# Altium PCB ALTAIR_PD_Sergeant_V26.4c.PcbDoc (part 1 of 4)
Units mm, origin at the board's own origin, x right, y up, seen from the top; angles counter-clockwise.
Board outline 74 x 56 mm, 4 copper layers (Top Layer, Layer 1, Layer 2, Bottom Layer), stack 1.675 mm thick; 239 components, 159 nets, 760 pads, 127 vias.
Unrouted connection lines stored in the file: 489.
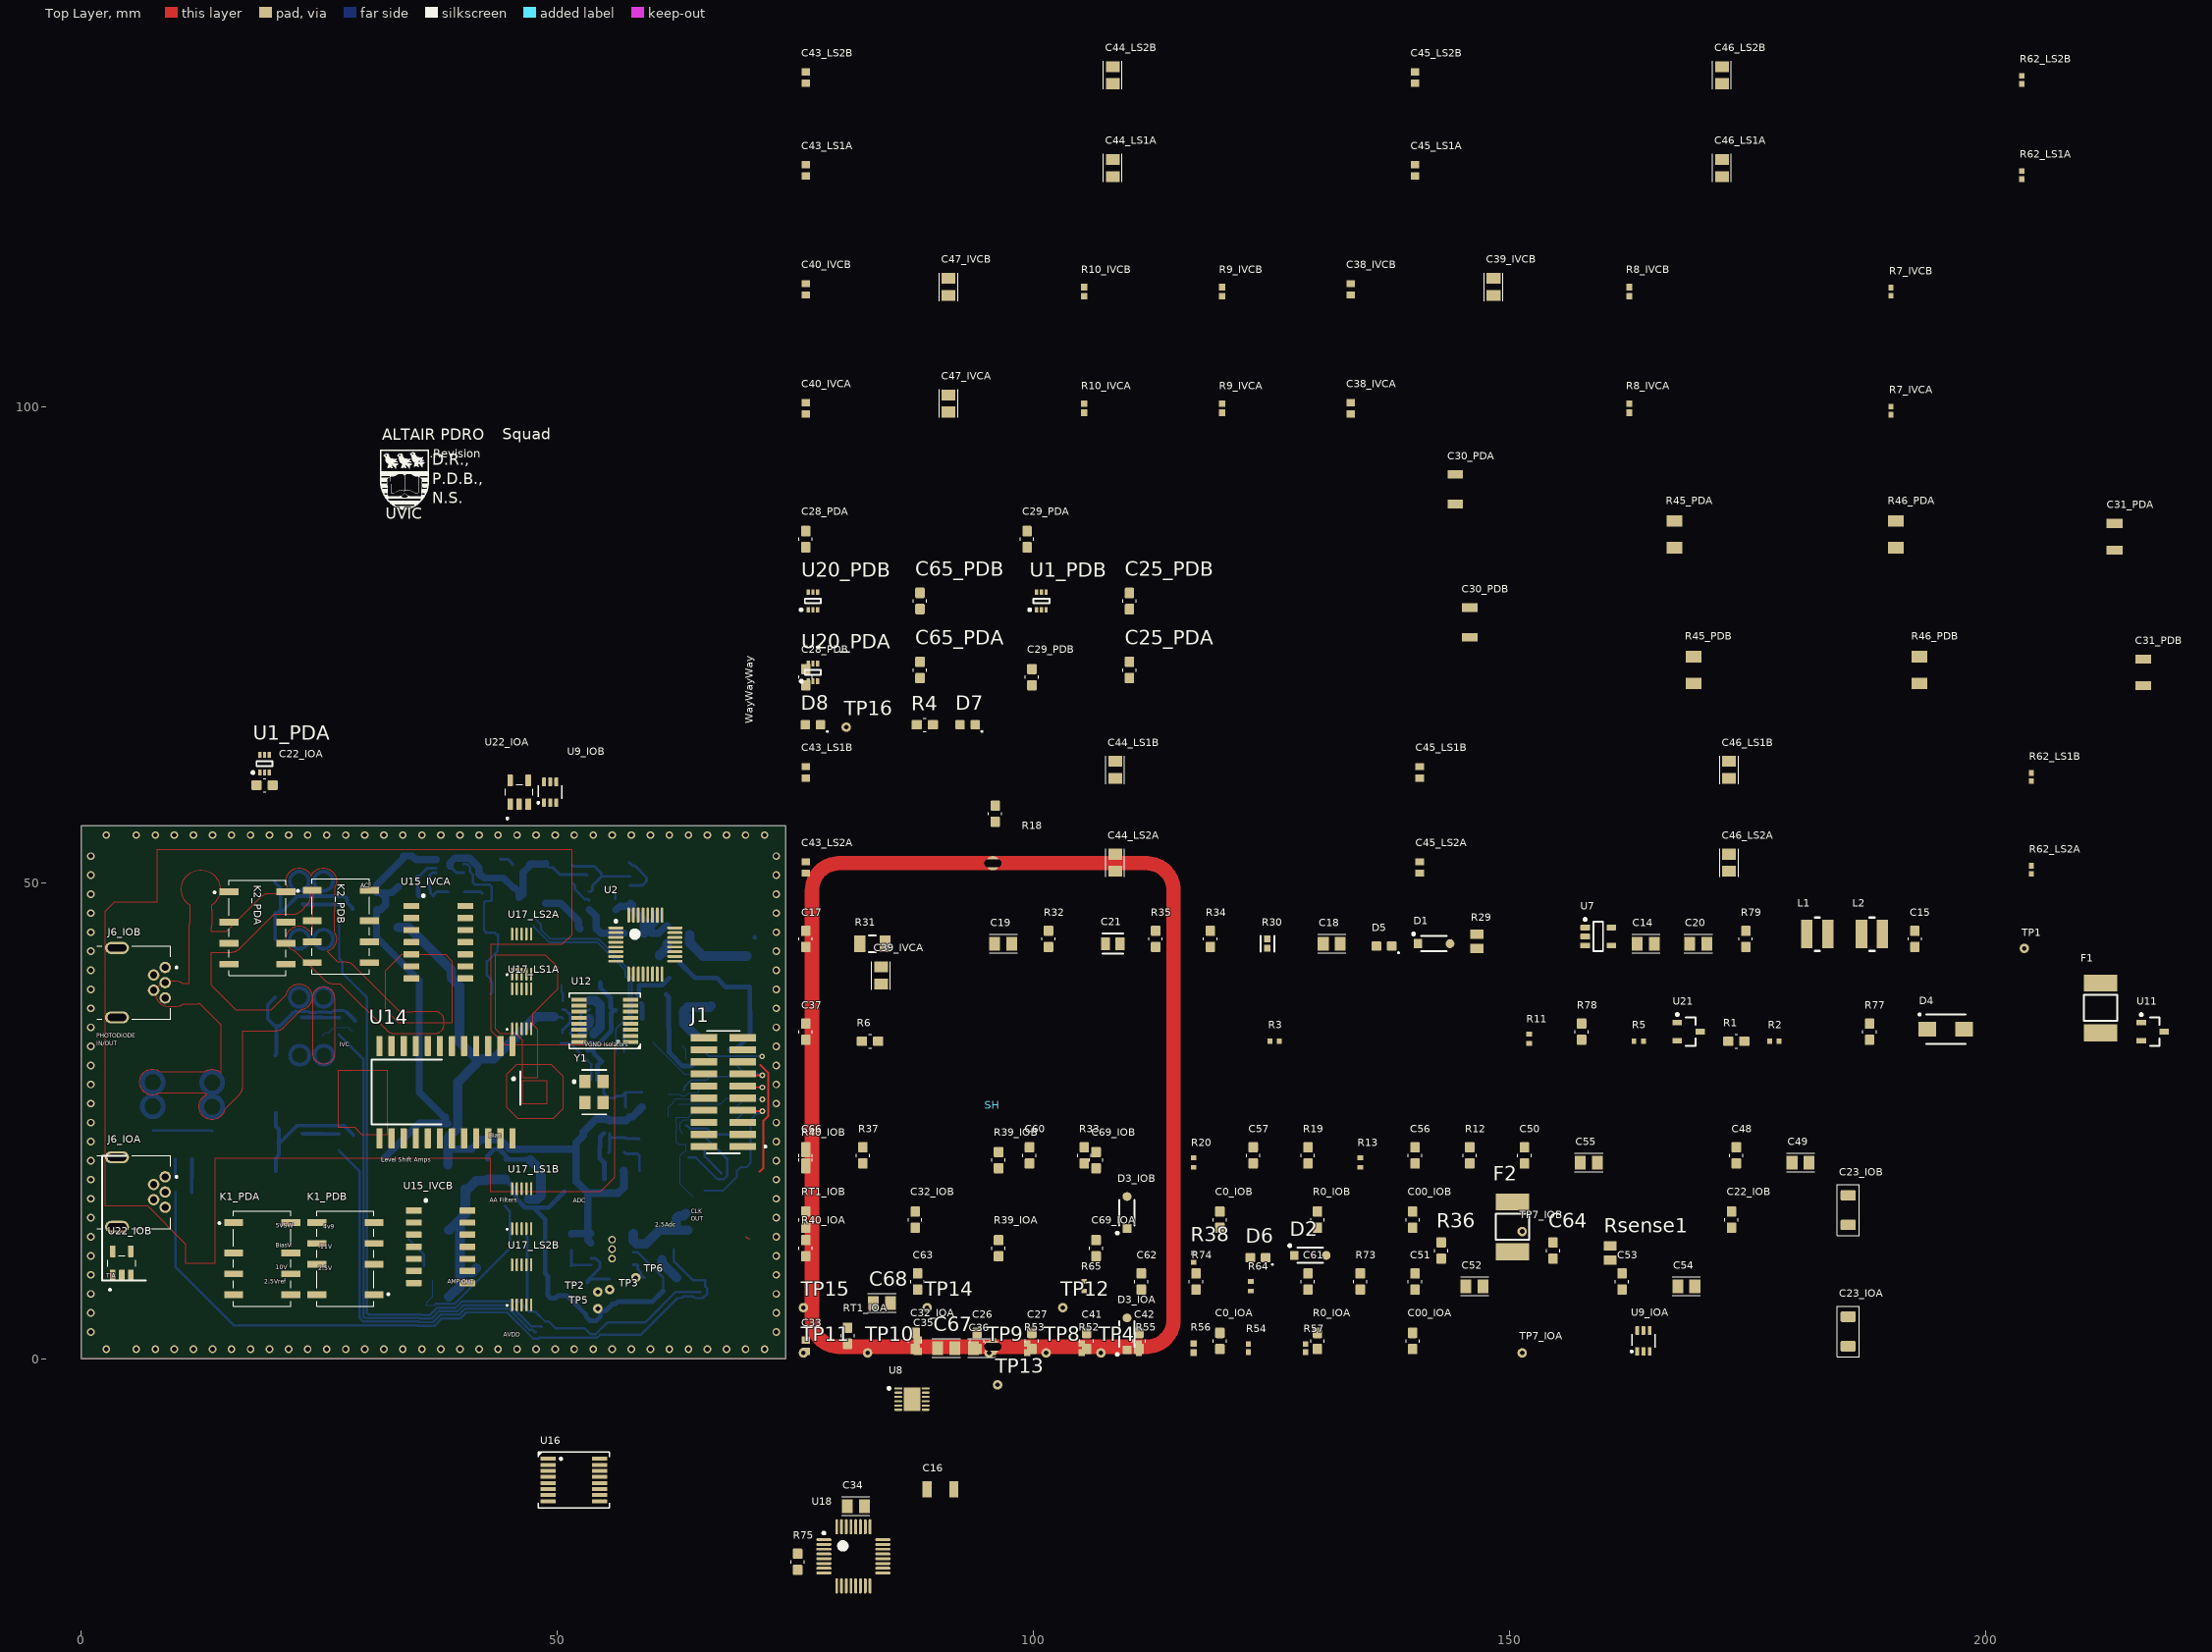
[diagram p0: Top Layer view]
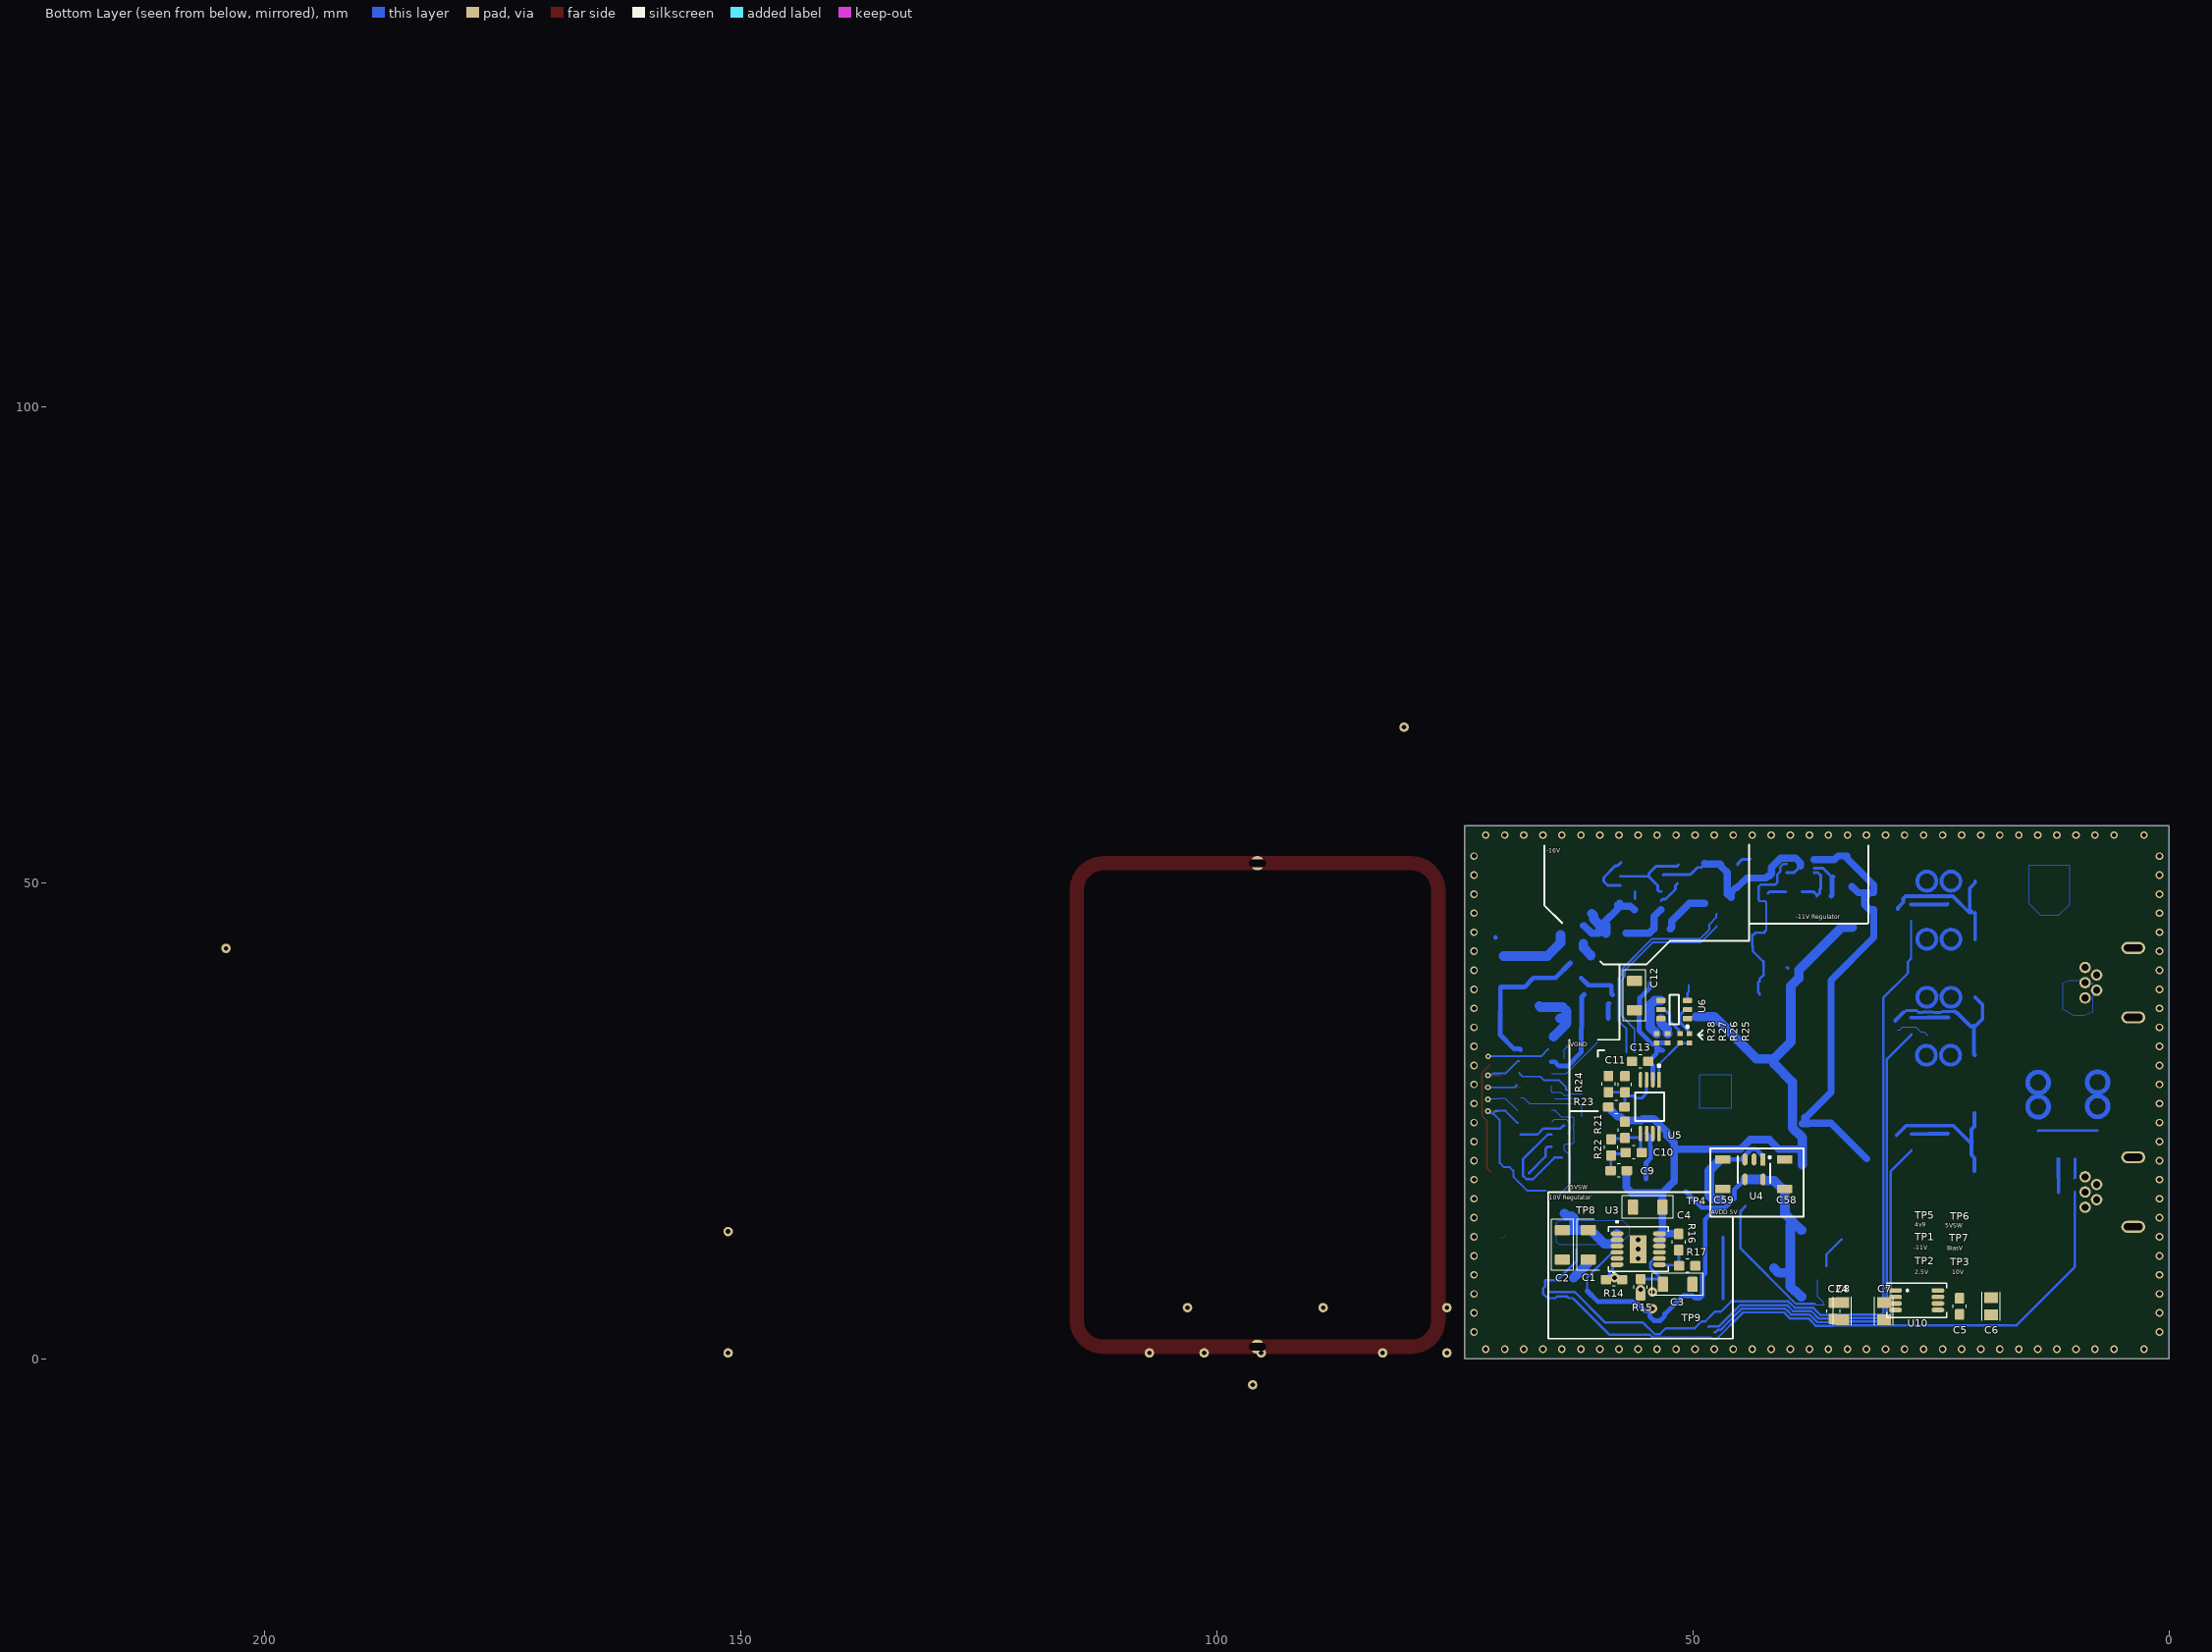
[diagram p1: Bottom Layer view, seen from below]
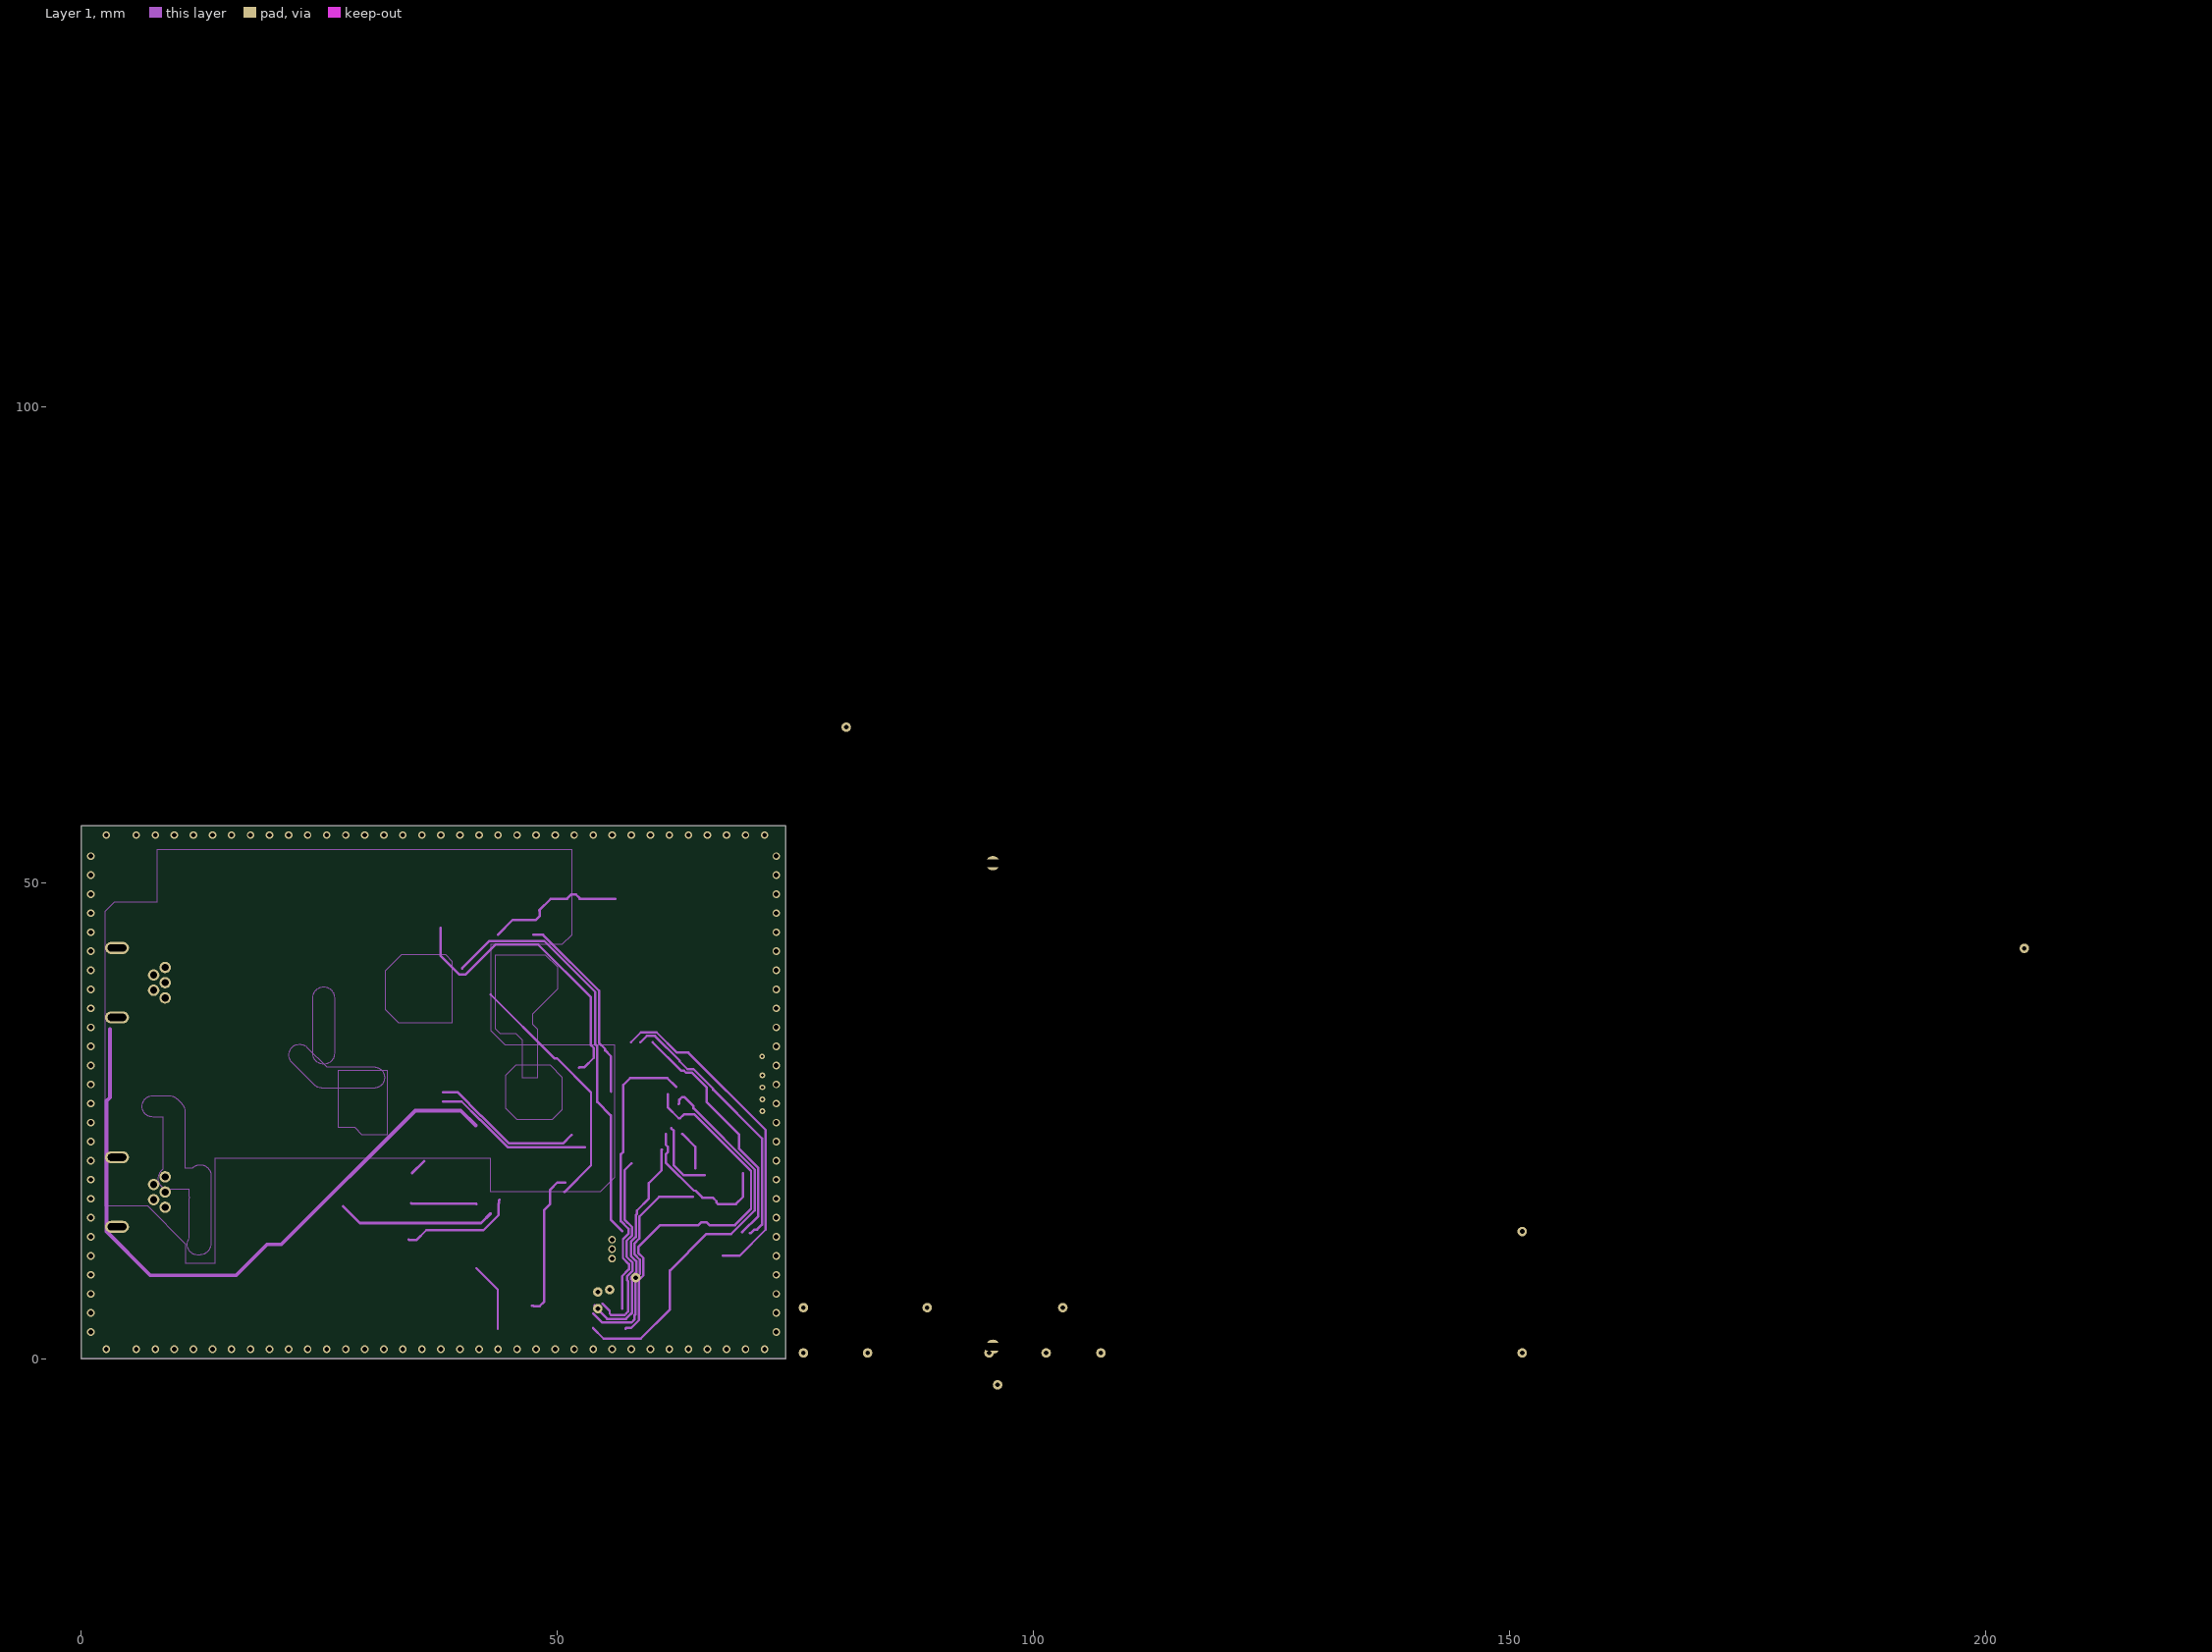
[diagram p2: Layer 1]
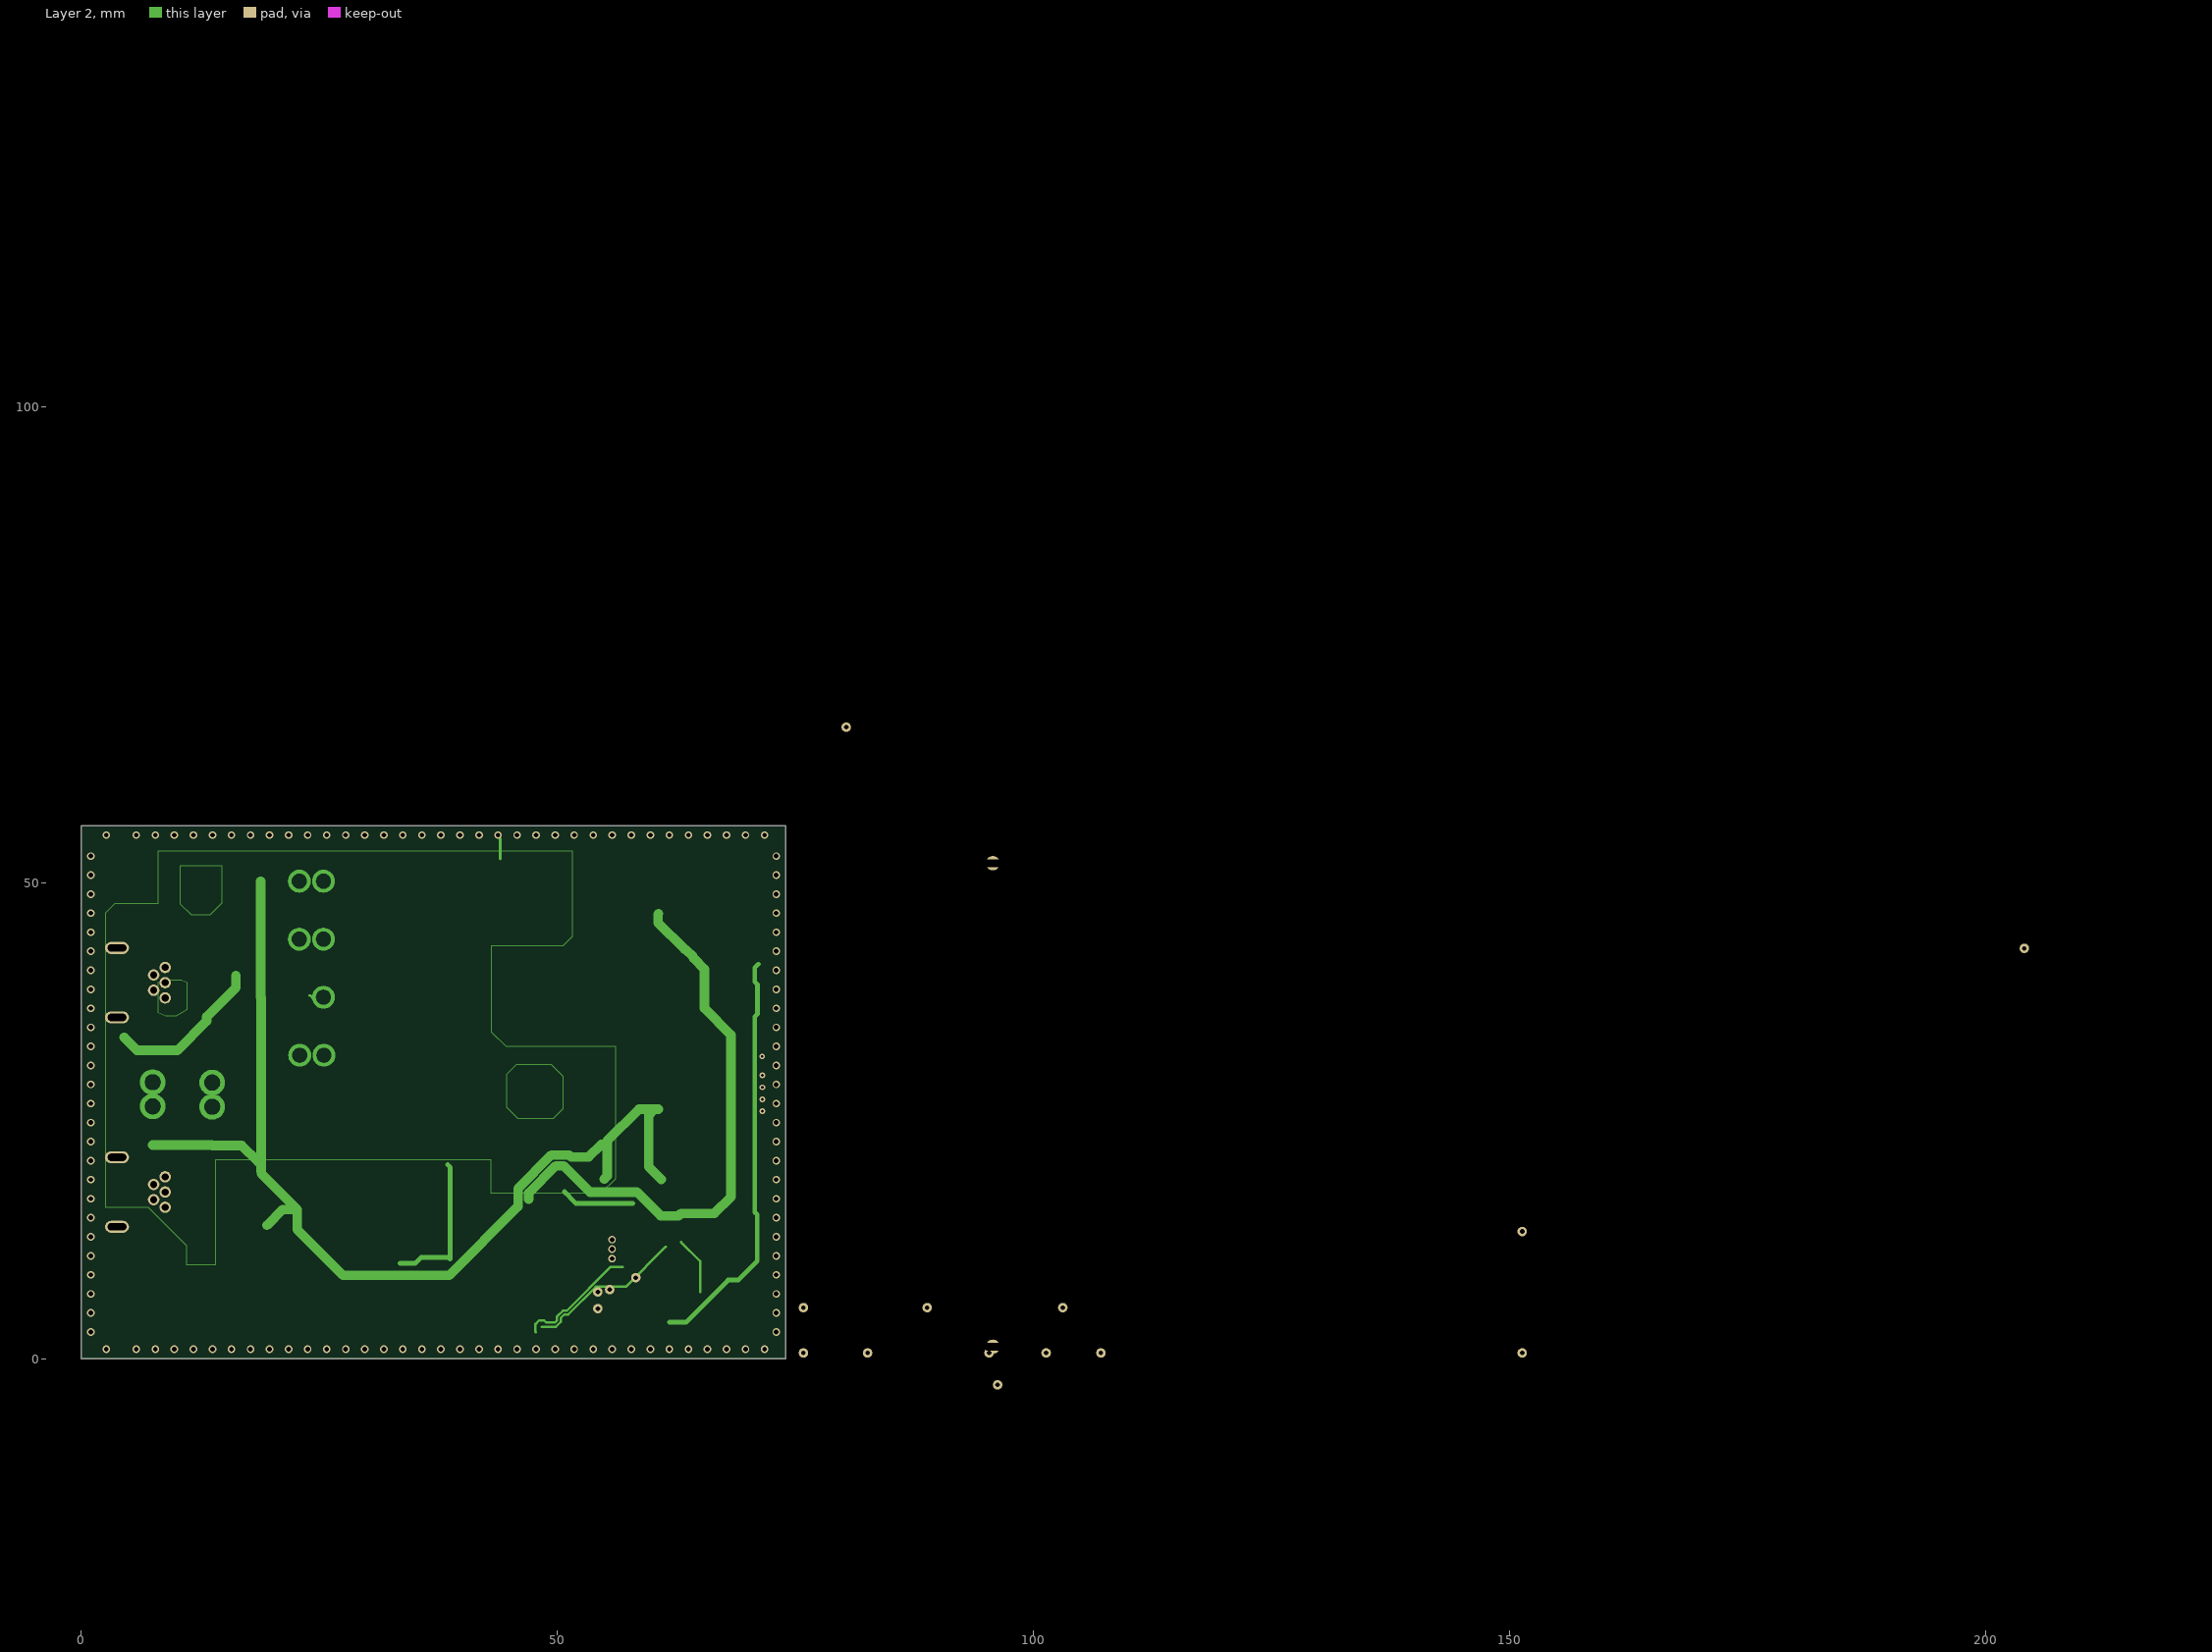
[diagram p3: Layer 2]

## Layer stack, top to bottom
Top Solder: solder mask 0.0254, Solder Resist, Dk 3.5
Top Layer: signal copper 0.0356
Dielectric 2: prepreg 0.1702, FR-408, Dk 4.1
Layer 1: signal copper 0.035
Dielectric 1: core 1.1938, FR-408, Dk 4.8
Layer 2: signal copper 0.035
Dielectric 3: prepreg 0.1702, FR-408, Dk 4.1
Bottom Layer: signal copper 0.0356
Bottom Solder: solder mask 0.0254, Solder Resist, Dk 3.5

## Board outline
0,0 74,0 74,56 0,56

## Design rules (kind name [scope] priority, off if disabled: settings)
AssemblyTestPointUsage [All] p1: isadvanced=TRUE
AssemblyTestpoint [All] p1: isadvanced=TRUE testpointundercomponent=TRUE minsize=1.016 maxsize=2.54 preferedsize=1.524 minholesize=0 maxholesize=1.016 preferedholesize=0.813 testpointgrid=0.025 usegrid=TRUE gridtolerance=0 allowsidetop=TRUE allowsidebottom=TRUE
Clearance ViaNotInPad [IsVia vs IsPad and not InPadClass('AllowVia')] p1: isadvanced=TRUE gap=0.152 ignorepadtopadclearanceinfootprint=FALSE
Clearance SoldierGuard [InNamedPolygon('SOLDIER_GUARD_L01_P001')] p2 off: isadvanced=TRUE gap=0.19 ignorepadtopadclearanceinfootprint=FALSE
Clearance UsbGuard [InNamedPolygon('GUARD_L02_P002') or InNamedPolygon('GUARD_L03_P002') or InNamedPolygon('GUARD_LBS_P001')] p3: isadvanced=TRUE gap=0.2 ignorepadtopadclearanceinfootprint=FALSE
Clearance Clearance_3 [InNamedPolygon('SYS_DVDD_L01_P001') or InNamedPolygon('SYS_DVDD_L03_P001')] p4 off: isadvanced=TRUE gap=0.25 ignorepadtopadclearanceinfootprint=FALSE
Clearance Clearance_1 [(ExistsOnLayer('Layer 1') Or ExistsOnLayer('Layer 2')) vs (ExistsOnLayer('Layer 1') Or ExistsOnLayer('Layer 2'))] p5: gap=0.2 ignorepadtopadclearanceinfootprint=TRUE except(0: Arc-Hole Track-Hole SMDPad-Hole THPad-Hole Via-Hole Fill-Hole Poly-Hole Region-Hole Text-Hole; 0.127: Arc-Arc Arc-Track Arc-SMDPad Arc-Text Track-Track Track-SMDPad Track-Text SMDPad-SMDPad SMDPad-Text Text-Text; 0.22: Arc-Via Track-Via Via-Text; 0.254: Arc-THPad Track-THPad SMDPad-THPad SMDPad-Via THPad-THPad THPad-Via THPad-Fill THPad-Poly THPad-Region THPad-Text Via-Via Fill-Fill Fill-Poly Fill-Region Poly-Poly Poly-Region Region-Region Hole-Hole) sourcerule=54 cellrowname=All cellrowtype=0 cellcolname=All cellcoltype=0 innerlayers=TRUE
Clearance Clearance_2 [(ExistsOnLayer('Top Layer') Or ExistsOnLayer('Bottom Layer')) vs (ExistsOnLayer('Top Layer') Or ExistsOnLayer('Bottom Layer'))] p6: gap=0.2 ignorepadtopadclearanceinfootprint=TRUE except(0: Arc-Hole Track-Hole SMDPad-Hole THPad-Hole Via-Hole Fill-Hole Poly-Hole Region-Hole Text-Hole; 0.127: Arc-Arc Arc-Track Arc-SMDPad Arc-Text Track-Track Track-SMDPad Track-Text SMDPad-SMDPad SMDPad-Text Text-Text; 0.22: Arc-Via Track-Via Via-Text; 0.254: Arc-THPad Track-THPad SMDPad-THPad SMDPad-Via THPad-THPad THPad-Via THPad-Fill THPad-Poly THPad-Region THPad-Text Via-Via Fill-Fill Fill-Poly Fill-Region Poly-Poly Poly-Region Region-Region Hole-Hole) sourcerule=54 cellrowname=All cellrowtype=0 cellcolname=All cellcoltype=0 outerlayers=TRUE
Clearance [All] p7: gap=0.254 ignorepadtopadclearanceinfootprint=TRUE ismatrix=TRUE
ComponentClearance [All] p1: isadvanced=TRUE gap=0.254 collisioncheckmode=3 verticalgap=0.254 showdistances=FALSE
FabricationTestPointUsage [All] p1: isadvanced=TRUE valid=0 allowmultiple=FALSE
FabricationTestpoint [All] p1: isadvanced=TRUE side=3 testpointundercomponent=TRUE minsize=1.016 maxsize=2.54 preferedsize=1.524 minholesize=0 maxholesize=1.016 preferedholesize=0.813 testpointgrid=0.025 allowsidetop=TRUE allowsidebottom=TRUE usegrid=TRUE gridtolerance=0
FanoutControl Fanout_BGA [IsBGA] p1: isadvanced=TRUE bgadir=Out bgaviamode=Centered fanoutstyle=Auto fanoutdirection=Alternating viagrid=0.025 // Fanout_BGA (Default Rule)
FanoutControl Fanout_LCC [IsLCC] p2: isadvanced=TRUE bgadir=Out bgaviamode=Centered fanoutstyle=Auto fanoutdirection=Alternating viagrid=0.025 // Fanout_LCC (Default Rule)
FanoutControl Fanout_SOIC [IsSOIC] p3: isadvanced=TRUE bgadir=Out bgaviamode=Centered fanoutstyle=Auto fanoutdirection=Alternating viagrid=0.025 // Fanout_SOIC (Default Rule)
FanoutControl Fanout_Small [(CompPinCount < 5)] p4: isadvanced=TRUE bgadir=Out bgaviamode=Centered fanoutstyle=Auto fanoutdirection=OutThenIn viagrid=0.025 // Fanout_Small (Default Rule)
FanoutControl Fanout_Default [All] p5: isadvanced=TRUE bgadir=Out bgaviamode=Centered fanoutstyle=Auto fanoutdirection=Alternating viagrid=0.025 // Fanout_Default (Default Rule)
Height [All] p1: isadvanced=TRUE minheight=0 maxheight=25.4 prefheight=12.7
HoleSize [All] p1: isadvanced=TRUE absolutevalues=TRUE maxlimit=4 minlimit=0.2 maxpercent=80.000 minpercent=20.000
HoleToHoleClearance [All] p1: isadvanced=TRUE gap=0.407 allowstackedmicrovias=TRUE // From PCBWay Advanced Capabilities
LayerPairs [All] p1: isadvanced=TRUE enforce=TRUE
MinimumSolderMaskSliver [All] p1: isadvanced=TRUE minsoldermaskwidth=0.076 // From PCBWay Advanced Capabilities
NetAntennae [All] p1 off: isadvanced=TRUE netantennaetolerance=0
PasteMaskExpansion [All] p1: isadvanced=TRUE expansion=0
PlaneClearance [All] p1: isadvanced=TRUE clearance=0.508
PlaneConnect [All] p1: isadvanced=TRUE planeconnectstyle=Relief reliefexpansion=0.508 reliefentries=4 reliefconductorwidth=0.254 reliefairgap=0.254
PolygonConnect PolygonConnectStyle_DCV [InPolygonClass('DirectConnectVias')] p1: isadvanced=TRUE thpad.connectstyle=Relief thpad.reliefconductorwidth=0.254 thpad.reliefentries=4 thpad.polygonreliefangle="90 Angle" thpad.airgapwidth=0.254 smdpad.connectstyle=Relief smdpad.reliefconductorwidth=0.254 smdpad.reliefentries=4 smdpad.polygonreliefangle="90 Angle" smdpad.airgapwidth=0.254 via.connectstyle=Direct via.reliefconductorwidth=0.254 via.reliefentries=2 via.polygonreliefangle="0 Angle" via.airgapwidth=0.254
PolygonConnect PolygonConnectStyle_DCE [InPolygonClass('DirectConnectEverything')] p2: isadvanced=TRUE connectstyle=Direct reliefconductorwidth=0.254 reliefentries=2 polygonreliefangle="0 Angle" airgapwidth=0.254
PolygonConnect [All] p3: connectstyle=Relief reliefconductorwidth=0.254 reliefentries=4 polygonreliefangle="90 Angle" airgapwidth=0.254
RoutingCorners [All] p1: isadvanced=TRUE cornerstyle=45-Degree minsetback=2.54 maxsetback=2.54
RoutingPriority [All] p1: isadvanced=TRUE routingpriority=0
RoutingVias RoutingViaStyle_3 [All] p1: isadvanced=TRUE holewidth=0.3 width=0.6 viastyle="Through Hole" minholewidth=0.3 minwidth=0.6 maxholewidth=0.711 maxwidth=1.27
RoutingVias [All] p2: holewidth=0.711 width=1.27 viastyle="Through Hole" minholewidth=0.711 minwidth=1.27 maxholewidth=0.711 maxwidth=1.27
ShortCircuit [All] p1: isadvanced=TRUE allowed=FALSE
SilkToSilkClearance [All] p1 off: isadvanced=TRUE silktosilkclearance=0.254
SilkToSolderMaskClearance [IsPad or IsPoly] p1: isadvanced=TRUE minsilkscreentomaskgap=0.15 clearancetoexposedcopper=TRUE
SolderMaskExpansion ExposeGuard [InNet('PD_A')] p1: isadvanced=TRUE expansion=1 istentingtop=FALSE
SolderMaskExpansion [All] p2: isadvanced=TRUE expansion=0 istentingtop=FALSE
SupplyNets "Schematic Supply Nets_4" [InNet('LEDNG')] p1: voltage=0.000
SupplyNets "Schematic Supply Nets" [InNet('LEDPG')] p2: voltage=0.000
SupplyNets "Schematic Supply Nets_3" [InNet('-11V_EN')] p3: voltage=0.000
SupplyNets "Schematic Supply Nets_5" [InNet('3V3')] p4: isadvanced=TRUE voltage=0.000
SupplyNets "Schematic Supply Nets_9" [InNet('A2V5')] p5: isadvanced=TRUE voltage=0.000
SupplyNets "Schematic Supply Nets_8" [InNet('-11V')] p6: isadvanced=TRUE voltage=0.000
SupplyNets "Schematic Supply Nets_7" [InNet('4V9')] p7: isadvanced=TRUE voltage=0.000
SupplyNets "Schematic Supply Nets_6" [InNet('10V')] p8: isadvanced=TRUE voltage=0.000
SupplyNets "Schematic Supply Nets_2" [InNet('SYS_GND')] p9: isadvanced=TRUE voltage=0.000
SupplyNets "Schematic Supply Nets_1" [InNet('A5VSW')] p10: isadvanced=TRUE voltage=0.000
UnRoutedNet [All] p1: isadvanced=TRUE
UnpouredPolygon [All] p1: isadvanced=TRUE
Width [All] p1: maxlimit=5 minlimit=0.127 preferedwidth=0.254 midlayer1_minwidth=0.254 midlayer2_minwidth=0.254 minimp=50.000000 maximp=50.000000 favimp=50.000000
4 further rules are at their usual default settings.

## Classes and differential pairs
channel class BIAS_IO: IOA IOB
component class IOB: C0_IOB C00_IOB C22_IOB C23_IOB C32_IOB C69_IOB D3_IOB J4_IOB J6_IOB R0_IOB R39_IOB R40_IOB RT1_IOB TP7_IOB U9_IOB U22_IOB
component class IOA: C0_IOA C00_IOA C22_IOA C23_IOA C32_IOA C69_IOA D3_IOA J4_IOA J6_IOA R0_IOA R39_IOA RT1_IOA TP7_IOA U9_IOA U22_IOA
component class ADCA: C51 C52 C53 C54 C61 C62 C63 C67 R64 R65 R73 R74 R75 TP10 TP11 U2
channel class TIA_SWITCHES: PDA PDB
channel class Level_Shifter: LS1A LS1B LS2A LS2B
channel class IVC_INTEGRATOR: IVCA IVCB
component class PWR-: C14 C15 C16 C17 C18 C19 C20 C21 D1 D5 L1 L2 R29 R30 R31 R32 R34 R35 R79 TP1 U7 U8
component class LS2B: C43_LS2B C44_LS2B C45_LS2B C46_LS2B R62_LS2B U17_LS2B
component class LS1A: C43_LS1A C44_LS1A C45_LS1A C46_LS1A R62_LS1A U17_LS1A
component class IVCB: C38_IVCB C39_IVCB C40_IVCB C47_IVCB R7_IVCB R8_IVCB R9_IVCB R10_IVCB U15_IVCB
component class IVCA: C38_IVCA C39_IVCA C40_IVCA C47_IVCA R7_IVCA R8_IVCA R9_IVCA R10_IVCA U15_IVCA
component class PDB: C25_PDB C28_PDB C29_PDB C30_PDB C31_PDB C65_PDB K1_PDB K2_PDB R45_PDB R46_PDB U1_PDB U13_Designator2 U20_PDB
component class PDA: C25_PDA C28_PDA C29_PDA C30_PDA C31_PDA C65_PDA K1_PDA K2_PDA R45_PDA R46_PDA U1_PDA U13_Designator1 U20_PDA
component class LS1B: C43_LS1B C44_LS1B C45_LS1B C46_LS1B R62_LS1B U17_LS1B
component class LS2A: C43_LS2A C44_LS2A C45_LS2A C46_LS2A R62_LS2A U17_LS2A
polygon class DirectConnectVias: NONET_L01_P265 SYS_GND_L02_P001 SYS_GND_L03_P001 SYS_GND_L04_P001
polygon class DirectConnectEverything: GUARD_L01_P231 GUARD_L01_P238 GUARD_L02_P187 GUARD_L02_P219 GUARD_L04_P001 GUARD_L04_P002 GUARD_L04_P003 Intercon_guard Intercon_guard_Sub IVC_GUARD_SUB NETJ9_1_L01_P226 NONET_L01_P264 NONET_L01_P265 NONET_L02_P241 NONET_L03_P191 SOLDIER_GUARD_L01_P001 SOLDIER_GUARD_L02_P001 SOLDIER_GUARD_L03_P001 SOLDIER_GUARD_L04_P001 SYS_GND_L02_P001 SYS_GND_L03_P001 SYS_GND_L04_P001 TIA_GUARD_SUB TraceGuard VBAT_L04_P002
component class ADCB: C48 C49 C50 C55 C56 C57 C60 C66 C68 R12 R13 R19 R20 R33 R37 TP12 TP13 TP14 TP15 U18
component class PWR+: C1 C2 C3 C4 C5 C6 C7 C8 C9 C10 C11 C12 C13 C24 C58 C59 D7 D8 R14 R15 R16 R17 R18 R21 R22 R23 R24 R25 R26 R27 R28 TP2 TP3 TP5 TP6 TP16 U3 U4 U5 U6 U10
component class ACF: C33 C34 C35 C36 R52 R53 R54 R55 R56 R57 U14
component class INT: C26 C27 C37 C41 C42 C64 D4 D6 F1 F2 J1 R1 R2 R3 R5 R6 R11 R36 R38 R77 R78 Rsense1 SH U11 U12 U16 U21 Y1

## Components (designator, comment, footprint, x,y, rotation, side; value= is the part's Value field where it differs from the comment)
C00_IOA "TBD OPT" "CAP 0603 IPC MID DENSITY" 139.85,1.85 r90 top (schematic designator C00)
C0_IOA "TBD OPT" "CAP 0603 IPC MID DENSITY" 119.6,1.85 r90 top (schematic designator C0)
C00_IOB "TBD OPT" "CAP 0603 IPC MID DENSITY" 139.85,14.6 r90 top (schematic designator C00)
C0_IOB "TBD OPT" "CAP 0603 IPC MID DENSITY" 119.6,14.6 r90 top (schematic designator C0)
C1 "10uF" "CAP 1206 IPC LOW DENSITY" 61,11.947 r90 bottom
C2 "10uF" "CAP 1206 IPC LOW DENSITY" 63.718,11.947 r90 bottom
C3 "10uF" "CAP 1206 IPC LOW DENSITY" 51.6,7.8 r0 bottom
C4 "10uF" "CAP 1206 IPC LOW DENSITY" 54.75,15.925 r180 bottom
C5 "0.1uF" "CAP 0603 IPC MID DENSITY" 22,5.5 r90 bottom
C6 "10uF" "CAP 0805 IPC MID DENSITY" 18.688,5.5 r270 bottom
C7 "10uF" "CAP 0805 IPC MID DENSITY" 29.938,5 r270 bottom
C8 "10uF" "CAP 0805 IPC MID DENSITY" 34.311,5 r90 bottom
C9 "1uF" "CAP 0603 IPC MID DENSITY" 57.8,19.75 r180 bottom
C10 "0.1uF" "CAP 0603 IPC MID DENSITY" 56.225,21.65 r180 bottom
C11 "0.1uF" "CAP 0603 IPC MID DENSITY" 57.15,28.825 r270 bottom
C12 "10uF" "CAP 1206 IPC LOW DENSITY" 56.15,38.15 r270 bottom
C13 "0.1uF" "CAP 0603 IPC MID DENSITY" 55.55,31.225 r180 bottom
C14 "10uF" "CAP 0805 IPC MID DENSITY" 164.35,43.6 r0 top
C15 "1uF" "CAP 0603 IPC MID DENSITY" 192.6,44.1 r90 top
C16 "330pF" "CAP 1206 NON-IPC KEMET NP0" 90.25,-13.75 r0 top
C17 "1uF DNP" "CAP 0603 IPC MID DENSITY" 76.1,44.1 r90 top
C18 "10uF" "CAP 0805 IPC MID DENSITY" 131.35,43.6 r0 top
C19 "10uF" "CAP 0805 IPC MID DENSITY" 96.85,43.6 r0 top
C20 "10uF" "CAP 0805 IPC MID DENSITY" 169.85,43.6 r0 top
C21 "4.7uF" "CAP 0805 NON-IPC KEMET X5R" 108.35,43.6 r0 top
C22_IOA "0.1uF" "CAP 0603 IPC MID DENSITY" 19.25,60.25 r0 top (schematic designator C22)
C22_IOB "0.1uF" "CAP 0603 IPC MID DENSITY" 173.35,14.6 r90 top (schematic designator C22)
C23_IOA "10uF" "CAP 1206 IPC LOW DENSITY" 185.6,2.85 r90 top (schematic designator C23)
C23_IOB "10uF" "CAP 1206 IPC LOW DENSITY" 185.6,15.6 r90 top (schematic designator C23)
C24 "0.1uF" "CAP 0603 IPC MID DENSITY" 35.25,5 r270 bottom
C25_PDA "0.1uF" "CAP 0603 IPC MID DENSITY" 110.1,72.35 r90 top (schematic designator C25)
C25_PDB "0.1uF" "CAP 0603 IPC MID DENSITY" 110.1,79.6 r90 top (schematic designator C25)
C26 "0.1uF" "CAP 0603 IPC MID DENSITY" 94.1,1.85 r90 top
C27 "0.1uF" "CAP 0603 IPC MID DENSITY" 99.85,1.85 r90 top
C28_PDA "1uF" "CAP 0603 IPC MID DENSITY" 76.1,86.1 r90 top (schematic designator C28)
C28_PDB "1uF" "CAP 0603 IPC MID DENSITY" 76.1,71.6 r90 top (schematic designator C28)
C29_PDA "0.1uF" "CAP 0603 IPC MID DENSITY" 99.35,86.1 r90 top (schematic designator C29)
C29_PDB "0.1uF" "CAP 0603 IPC MID DENSITY" 99.85,71.6 r90 top (schematic designator C29)
C30_PDA "10pF" "CAP 1206 UNKNOWN" 144.35,91.35 r90 top (schematic designator C30)
C30_PDB "10pF" "CAP 1206 UNKNOWN" 145.85,77.35 r90 top (schematic designator C30)
C31_PDA "300pF" "CAP 1206 NON-IPC KEMET NP0" 213.6,86.35 r90 top (schematic designator C31)
C31_PDB "300pF" "CAP 1206 NON-IPC KEMET NP0" 216.6,72.1 r90 top (schematic designator C31)
C32_IOA "0.1uF" "CAP 0603 IPC MID DENSITY" 87.6,1.85 r90 top (schematic designator C32)
C32_IOB "0.1uF" "CAP 0603 IPC MID DENSITY" 87.6,14.6 r90 top (schematic designator C32)
C33 "0.1uF" "CAP 0603 NON-IPC KEMET X7R" 76.1,1.35 r90 top
C34 "10uF" "CAP 0805 IPC MID DENSITY" 81.35,-15.5 r0 top
C35 "0.1uF" "CAP 0603 NON-IPC KEMET X7R" 87.85,1.35 r90 top
C36 "10uF" "CAP 0805 IPC MID DENSITY" 94.6,1.1 r0 top
C37 "0.1uF" "CAP 0603 IPC MID DENSITY" 76.1,34.35 r90 top
C38_IVCA "0.1uF" "CAP 0603 NON-IPC KEMET X7R" 133.35,99.85 r90 top (schematic designator C38)
C38_IVCB "0.1uF" "CAP 0603 NON-IPC KEMET X7R" 133.35,112.35 r90 top (schematic designator C38)
C39_IVCA "10uF" "CAP 0805 IPC MID DENSITY" 84,40.25 r90 top (schematic designator C39)
C39_IVCB "10uF" "CAP 0805 IPC MID DENSITY" 148.35,112.6 r90 top (schematic designator C39)
C40_IVCA "0.1uF" "CAP 0603 NON-IPC KEMET X7R" 76.1,99.85 r90 top (schematic designator C40)
C40_IVCB "0.1uF" "CAP 0603 NON-IPC KEMET X7R" 76.1,112.35 r90 top (schematic designator C40)
C41 "0.1uF" "CAP 0603 IPC MID DENSITY" 105.6,1.85 r90 top
C42 "0.1uF" "CAP 0603 IPC MID DENSITY" 111.1,1.85 r90 top
C43_LS1A "0.1uF" "CAP 0603 NON-IPC KEMET X7R" 76.1,124.85 r90 top (schematic designator C43)
C43_LS1B "0.1uF" "CAP 0603 NON-IPC KEMET X7R" 76.1,61.6 r90 top (schematic designator C43)
C43_LS2A "0.1uF" "CAP 0603 NON-IPC KEMET X7R" 76.1,51.6 r90 top (schematic designator C43)
C43_LS2B "0.1uF" "CAP 0603 NON-IPC KEMET X7R" 76.1,134.6 r90 top (schematic designator C43)
C44_LS1A "10uF" "CAP 0805 IPC MID DENSITY" 108.35,125.1 r90 top (schematic designator C44)
C44_LS1B "10uF" "CAP 0805 IPC MID DENSITY" 108.6,61.85 r90 top (schematic designator C44)
C44_LS2A "10uF" "CAP 0805 IPC MID DENSITY" 108.6,52.1 r90 top (schematic designator C44)
C44_LS2B "10uF" "CAP 0805 IPC MID DENSITY" 108.35,134.85 r90 top (schematic designator C44)
C45_LS1A "0.1uF" "CAP 0603 NON-IPC KEMET X7R" 140.1,124.85 r90 top (schematic designator C45)
C45_LS1B "0.1uF" "CAP 0603 NON-IPC KEMET X7R" 140.6,61.6 r90 top (schematic designator C45)
C45_LS2A "0.1uF" "CAP 0603 NON-IPC KEMET X7R" 140.6,51.6 r90 top (schematic designator C45)
C45_LS2B "0.1uF" "CAP 0603 NON-IPC KEMET X7R" 140.1,134.6 r90 top (schematic designator C45)
C46_LS1A "10uF" "CAP 0805 IPC MID DENSITY" 172.35,125.1 r90 top (schematic designator C46)
C46_LS1B "10uF" "CAP 0805 IPC MID DENSITY" 173.1,61.85 r90 top (schematic designator C46)
C46_LS2A "10uF" "CAP 0805 IPC MID DENSITY" 173.1,52.1 r90 top (schematic designator C46)
C46_LS2B "10uF" "CAP 0805 IPC MID DENSITY" 172.35,134.85 r90 top (schematic designator C46)
C47_IVCA "10uF" "CAP 0805 IPC MID DENSITY" 91.1,100.35 r90 top (schematic designator C47)
C47_IVCB "10uF" "CAP 0805 IPC MID DENSITY" 91.1,112.6 r90 top (schematic designator C47)
C48 "0.1uF" "CAP 0603 IPC MID DENSITY" 173.85,21.35 r90 top
C49 "10uF" "CAP 0805 IPC MID DENSITY" 180.6,20.6 r0 top
C50 "0.1uF" "CAP 0603 IPC MID DENSITY" 151.6,21.35 r90 top
C51 "0.1uF" "CAP 0603 IPC MID DENSITY" 140.1,8.1 r90 top
C52 "10uF" "CAP 0805 IPC MID DENSITY" 146.35,7.6 r0 top
C53 "0.1uF" "CAP 0603 IPC MID DENSITY" 161.85,8.1 r90 top
C54 "10uF" "CAP 0805 IPC MID DENSITY" 168.6,7.6 r0 top
C55 "10uF" "CAP 0805 IPC MID DENSITY" 158.35,20.6 r0 top
C56 "2nF" "CAP 0603 IPC MID DENSITY" 140.1,21.35 r90 top
C57 "2nF" "CAP 0603 IPC MID DENSITY" 123.1,21.35 r90 top
C58 "2.2uF" "CAP 1206 UNKNOWN" 40.35,19.375 r90 bottom
C59 "2.2uF" "CAP 1206 UNKNOWN" 46.85,19.375 r270 bottom
C60 "2nF" "CAP 0603 IPC MID DENSITY" 99.6,21.35 r90 top
C61 "2nF" "CAP 0603 IPC MID DENSITY" 128.85,8.1 r90 top
C62 "2nF" "CAP 0603 IPC MID DENSITY" 111.35,8.1 r90 top
C63 "2nF" "CAP 0603 IPC MID DENSITY" 87.85,8.1 r90 top
C64 "0.1uF" "CAP 0603 IPC MID DENSITY" 154.6,11.35 r90 top
C65_PDA "0.1uF" "CAP 0603 IPC MID DENSITY" 88.1,72.35 r90 top (schematic designator C65)
C65_PDB "0.1uF" "CAP 0603 IPC MID DENSITY" 88.1,79.6 r90 top (schematic designator C65)
C66 "2nF" "CAP 0603 IPC MID DENSITY" 76.1,21.35 r90 top
C67 "10uF" "CAP 0805 IPC MID DENSITY" 90.85,1.1 r0 top
C68 "10uF" "CAP 0805 IPC MID DENSITY" 84.1,5.85 r0 top
C69_IOA "1uF" "CAP 0603 IPC MID DENSITY" 106.6,11.6 r90 top (schematic designator C69)
C69_IOB "1uF" "CAP 0603 IPC MID DENSITY" 106.6,20.85 r90 top (schematic designator C69)
D1 "MBR0520" "SOD-123 ONSEMI SMALL PADS" 142.1,43.6 r0 top
D2 "Part?" "SOD-123 ONSEMI SMALL PADS" 129.1,10.85 r0 top
D3_IOA "MMSZ4679 DNP" "SOD-123 ONSEMI SMALL PADS" 109.85,2.6 r90 top (schematic designator D3)
D3_IOB "MMSZ4679 DNP" "SOD-123 ONSEMI SMALL PADS" 109.85,15.35 r90 top (schematic designator D3)
D4 "SMAJ12A" "DO-214AC SMA VISHAY" 195.85,34.6 r0 top
D5 "RED" "LED 0603 MID DENSITY" 136.85,43.35 r0 top
D6 "RED" "LED 0603 MID DENSITY" 123.6,10.6 r0 top
D7 "RED" "LED 0603 MID DENSITY" 93.1,66.6 r0 top
D8 "RED" "LED 0603 MID DENSITY" 76.85,66.6 r0 top
F1 "0ZCG0030FF2C" "POLYFUSE 1812 NON-IPC BELFUSE" 212.1,36.85 r90 top
F2 "0ZCG0030FF2C" "POLYFUSE 1812 NON-IPC BELFUSE" 150.35,13.85 r90 top
J1 "FTSH-110-01-X-DV-K-TR" SAMTEC_FTSH-110-01-X-DV-K-TR 67.443,28 r90 top
J6_IOA "USB-miniB" USB_MINIB_RIGHTANGLE 3.75,17.5 r270 top (schematic designator J6)
J6_IOB "USB-miniB" USB_MINIB_RIGHTANGLE 3.75,39.5 r270 top (schematic designator J6)
K1_PDA "3-1462037-1" RELAY_3-1462037-1 19,10.5 r0 top (schematic designator K1)
K1_PDB "3-1462037-1" RELAY_3-1462037-1 27.75,10.5 r180 top (schematic designator K1)
K2_PDA "3-1462037-1" RELAY_3-1462037-1 18.5,45.25 r0 top (schematic designator K2)
K2_PDB "3-1462037-1" RELAY_3-1462037-1 27.25,45.4 r0 top (schematic designator K2)
L1 "10uH" "IND VLS3012CX-1 NONSTANDARD TDK" 182.35,44.6 r0 top
L2 "10uH" "IND VLS3012CX-1 NONSTANDARD TDK" 188.1,44.6 r0 top
R0_IOA "TBD" "RES 0603 IPC MID DENSITY" 129.85,1.85 r90 top (schematic designator R0)
R0_IOB "TBD" "RES 0603 IPC MID DENSITY" 129.85,14.6 r90 top (schematic designator R0)
R1 "10k" "RES 0603 IPC MID DENSITY" 173.85,33.35 r0 top
R2 "47R" "RES 0402 NON-IPC SEI" 177.85,33.35 r0 top
R3 "33R" "RES 0402 NON-IPC YAGEO" 125.35,33.35 r0 top
R4 "680R" "RES 0603 IPC MID DENSITY" 88.6,66.6 r0 top
R5 "47R" "RES 0402 NON-IPC SEI" 163.6,33.35 r0 top
R6 "10k" "RES 0603 IPC MID DENSITY" 82.85,33.35 r0 top
R7_IVCA "0R" "RES 0402 IPC MID DENSITY" 190.1,99.6 r90 top (schematic designator R7)
R7_IVCB "0R" "RES 0402 IPC MID DENSITY" 190.1,112.1 r90 top (schematic designator R7)
R8_IVCA "0R OPT" "RES 0402 IPC LOW DENSITY" 162.6,99.85 r90 top (schematic designator R8)
R8_IVCB "0R OPT" "RES 0402 IPC LOW DENSITY" 162.6,112.1 r90 top (schematic designator R8)
R9_IVCA "0R OPT" "RES 0402 IPC LOW DENSITY" 119.85,99.85 r90 top (schematic designator R9)
R9_IVCB "0R OPT" "RES 0402 IPC LOW DENSITY" 119.85,112.1 r90 top (schematic designator R9)
R10_IVCA "0R OPT" "RES 0402 IPC LOW DENSITY" 105.35,99.85 r90 top (schematic designator R10)
R10_IVCB "0R OPT" "RES 0402 IPC LOW DENSITY" 105.35,112.1 r90 top (schematic designator R10)
R11 "47R" "RES 0402 NON-IPC SEI" 152.1,33.6 r90 top
R12 "2k" "RES 0603 IPC MID DENSITY" 145.85,21.35 r90 top
R13 "47R" "RES 0402 NON-IPC SEI" 134.35,20.6 r90 top
R14 "0R" "RES 0603 IPC MID DENSITY" 58.3,8.3 r0 bottom
R15 "100k" "RES 0603 IPC MID DENSITY" 55.5,7.5 r90 bottom
R16 "300k" "RES 0603 IPC MID DENSITY" 51.5,12.25 r90 bottom
R17 "10k" "RES 0603 IPC MID DENSITY" 50.6,9.75 r0 bottom
R18 "680R" "RES 0603 IPC MID DENSITY" 96,57.25 r90 top
R19 "2k" "RES 0603 IPC MID DENSITY" 128.85,21.35 r90 top
R20 "47R" "RES 0402 NON-IPC SEI" 116.85,20.6 r90 top
R21 "10k" "RES 0603 IPC MID DENSITY" 57.15,24.025 r90 bottom
R22 "10k" "RES 0603 IPC MID DENSITY" 58.6,22.2 r90 bottom
R23 "2.32k" "RES 0603 IPC MID DENSITY" 58.05,26.425 r0 bottom
R24 "2.23k" "RES 0603 IPC MID DENSITY" 58.875,28.85 r270 bottom
R25 "47R" "RES 0402 NON-IPC SEI" 50.375,33.65 r270 bottom
R26 "47R" "RES 0402 NON-IPC SEI" 51.35,33.65 r270 bottom
R27 "0.1R" "RES 0402 NON-IPC YAGEO" 52.675,33.65 r90 bottom
R28 "0.1R" "RES 0402 NON-IPC YAGEO" 53.825,33.65 r90 bottom
R29 "30k" "RES 0805 IPC HIGH DENSITY" 146.6,43.85 r90 top
R30 "1k" "RES 0402 IPC LOW DENSITY YAGEO" 124.6,43.6 r90 top
R31 "1.5k" "RES 1206 NON-IPC VISHAY" 83.1,43.6 r0 top
R32 "110k" "RES 0603 IPC MID DENSITY" 101.6,44.1 r90 top
R33 "2k" "RES 0603 IPC MID DENSITY" 105.35,21.35 r90 top
R34 "100k" "RES 0603 IPC MID DENSITY" 118.6,44.1 r90 top
R35 "100k" "RES 0603 IPC MID DENSITY" 112.85,44.1 r90 top
R36 "1k" "RES 0603 IPC MID DENSITY" 142.85,11.35 r90 top
R37 "2k" "RES 0603 IPC MID DENSITY" 82.1,21.35 r90 top
R38 "33R" "RES 0402 NON-IPC YAGEO" 116.85,10.6 r90 top
R39_IOA "1M" "RES 0603 IPC MID DENSITY" 96.35,11.6 r90 top (schematic designator R39)
R39_IOB "1M" "RES 0603 IPC MID DENSITY" 96.35,20.85 r90 top (schematic designator R39)
R40_IOA "1.1M" "RES 0603 IPC MID DENSITY" 76.1,11.6 r90 top (schematic designator R40)
R40_IOB "1.1M" "RES 0603 IPC MID DENSITY" 76.1,20.85 r90 top (schematic designator R40)
R45_PDA "1Meg" "RES 1206 IPC MID DENSITY" 167.35,86.6 r90 top (schematic designator R45)
R45_PDB "1Meg" "RES 1206 IPC MID DENSITY" 169.35,72.35 r90 top (schematic designator R45)
R46_PDA "10k" "RES 1206 IPC MID DENSITY" 190.6,86.6 r90 top (schematic designator R46)
R46_PDB "10k" "RES 1206 IPC MID DENSITY" 193.1,72.35 r90 top (schematic designator R46)
R52 "TBD DNP" "RES 0402 IPC LOW DENSITY" 105.1,1.1 r90 top
R53 "CAP DNP" "RES 0402 IPC LOW DENSITY" 99.35,1.1 r90 top
R54 "0R" "RES 0402 IPC MID DENSITY" 122.6,1.1 r90 top
R55 "TBD DNP" "RES 0402 IPC LOW DENSITY" 111.1,1.1 r90 top
R56 "CAP DNP" "RES 0402 IPC LOW DENSITY" 116.85,1.1 r90 top
R57 "0R" "RES 0402 IPC MID DENSITY" 128.6,1.1 r90 top
R62_LS1A "5.11k" "RES 0402 IPC MID DENSITY" 203.85,124.35 r90 top (schematic designator R62)
R62_LS1B "5.11k" "RES 0402 IPC MID DENSITY" 204.85,61.1 r90 top (schematic designator R62)
R62_LS2A "5.11k" "RES 0402 IPC MID DENSITY" 204.85,51.35 r90 top (schematic designator R62)
R62_LS2B "5.11k" "RES 0402 IPC MID DENSITY" 203.85,134.35 r90 top (schematic designator R62)
R64 "47R" "RES 0402 NON-IPC SEI" 122.85,7.6 r90 top
R65 "47R" "RES 0402 NON-IPC SEI" 105.35,7.6 r90 top
R73 "2k" "RES 0603 IPC MID DENSITY" 134.35,8.1 r90 top
R74 "2k" "RES 0603 IPC MID DENSITY" 117.1,8.1 r90 top
R75 "2k" "RES 0603 IPC MID DENSITY" 75.25,-21.35 r90 top
R77 "1k" "RES 0603 IPC MID DENSITY" 187.85,34.35 r90 top
R78 "1k" "RES 0603 IPC MID DENSITY" 157.6,34.35 r90 top
R79 "1k" "RES 0603 IPC MID DENSITY" 174.85,44.1 r90 top
Rsense1 "0.1" "RES 0805 IPC HIGH DENSITY" 160.6,11.1 r90 top
RT1_IOA "NTC 0603 10K 1%" "RES 0603 IPC MID DENSITY" 80.5,2.4 r90 top value="NT 10K" (schematic designator RT1)
RT1_IOB "NTC 0603 10K 1%" "RES 0603 IPC MID DENSITY" 76.1,14.6 r90 top value="NT 10K" (schematic designator RT1)
SH "Mount-hole" MS511-20 95.75,1.25 r90 top
TP1 "Testpoint" "TESTPOINT THT" 204.1,43.1 r90 top
TP2 "Testpoint" "TESTPOINT THT" 54.25,7 r0 top
TP3 "Testpoint" "TESTPOINT THT" 55.5,7.25 r90 top
TP4 "Testpoint" "TESTPOINT THT" 107.1,0.6 r90 top
TP5 "Testpoint" "TESTPOINT THT" 54.25,5.25 r90 top
TP6 "Testpoint" "TESTPOINT THT" 58.25,8.5 r0 top
TP7_IOA "Testpoint" "TESTPOINT THT" 151.35,0.6 r90 top (schematic designator TP7)
TP7_IOB "Testpoint" "TESTPOINT THT" 151.35,13.35 r90 top (schematic designator TP7)
TP8 "Testpoint" "TESTPOINT THT" 101.35,0.6 r90 top
TP9 "Testpoint" "TESTPOINT THT" 95.35,0.6 r90 top
TP10 "Testpoint" "TESTPOINT THT" 82.6,0.6 r90 top
TP11 "Testpoint" "TESTPOINT THT" 75.85,0.6 r90 top
TP12 "Testpoint" "TESTPOINT THT" 103.1,5.35 r90 top
TP13 "Testpoint" "TESTPOINT THT" 96.25,-2.75 r90 top
TP14 "Testpoint" "TESTPOINT THT" 88.85,5.35 r90 top
TP15 "Testpoint" "TESTPOINT THT" 75.85,5.35 r90 top
TP16 "Testpoint" "TESTPOINT THT" 80.35,66.35 r90 top
U1_PDA "DRV8210DRLR" SOT563 19.25,62.5 r90 top (schematic designator U1)
U1_PDB "DRV8210DRLR" SOT563 100.85,79.6 r90 top (schematic designator U1)
U2 "ADS124S08IPBSR" "32TQFP 7X7MM IPC LOW DENSITY" 59.25,43.5 r0 top
U3 "LT3045" "12-TSOP 0.65MM PITCH 3MM WIDTH EP IPC MID DENSITY" 55.75,11.5 r180 bottom
U4 "ADP7142AUJZ-5.0-R7" "SOT23-5 HIGH DENSITY AD" 43.6,19.875 r270 bottom
U5 "OPA2182" "8-TSSOP 0.65MM PITCH 4.4MM WIDTH IPC MID DENSITY" 54.55,26.475 r270 bottom
U6 "ZXTC2045E6" "SOT23-6 NON-IPC DIODES" 51.975,36.675 r0 bottom
U7 "LM2611AMF/NOPB" "SOT23-5 MID DENSITY" 159.35,44.35 r0 top
U8 "LT3094EDD#PBF" "12DFN 3x3MM EP IPC MID DENSITY" 87.25,-4.25 r0 top
U9_IOA "DAC5311" "SOT363-6 MID DENSITY" 164.1,1.85 r90 top (schematic designator U9)
U9_IOB "DAC5311" "SOT363-6 MID DENSITY" 49.25,59.5 r90 top (schematic designator U9)
U10 "REF5025" "8-TSOP 0.65MM PITCH 3MM WIDTH IPC MID DENSITY" 26.5,6.133 r180 bottom
U11 "SI2347DS-T1-GE3" SOT95P245X110-3N 217.6,34.35 r0 top
U12 "ISO7760DBQR" "16-SSOP 0.635MM PITCH 5.4MM WIDTH NON-IPC TI" 55,35.5 r180 top
U14 "ACF2101BU" "24-SOIC 7.6MM WIDE LOW DENSITY" 38.305,28 r270 top
U15_IVCA "IVC102/SO" "14-SOIC 4MM WIDE LOW DENSITY" 37.5,43.75 r0 top (schematic designator U15)
U15_IVCB "IVC102/SO" "14-SOIC 4MM WIDE LOW DENSITY" 37.75,11.75 r0 top (schematic designator U15)
U16 "ISO7760DBQR" "16-SSOP 0.635MM PITCH 5.4MM WIDTH NON-IPC TI" 51.75,-12.75 r0 top
U17_LS1A "LT1991AIMS" "10-SOP 0.5MM PITCH 3MM WIDTH IPC HIGH DENSITY" 46.25,36.75 r90 top (schematic designator U17)
U17_LS1B "LT1991AIMS" "10-SOP 0.5MM PITCH 3MM WIDTH IPC HIGH DENSITY" 46.25,15.75 r90 top (schematic designator U17)
U17_LS2A "LT1991AIMS" "10-SOP 0.5MM PITCH 3MM WIDTH IPC HIGH DENSITY" 46.25,42.5 r90 top (schematic designator U17)
U17_LS2B "LT1991AIMS" "10-SOP 0.5MM PITCH 3MM WIDTH IPC HIGH DENSITY" 46.25,7.75 r90 top (schematic designator U17)
U18 "ADS124S08IPBSR" "32TQFP 7X7MM IPC LOW DENSITY" 81.1,-20.775 r0 top
U20_PDA "DRV8210DRLR" SOT563 76.85,72.1 r90 top (schematic designator U20)
U20_PDB "DRV8210DRLR" SOT563 76.85,79.6 r90 top (schematic designator U20)
U21 "SSM3J332R,LF" SOT95P245X110-3N 168.85,34.35 r0 top
U22_IOA "TLV387DBVR" SOT95P280X145-5N 46,59.5 r90 top (schematic designator U22)
U22_IOB "TLV387DBVR" SOT95P280X145-5N 4.25,10 r90 top (schematic designator U22)
Y1 "SIT1602Bx" "4PQFN NON-IPC SITIME" 53.864,28 r0 top

## Footprints (in the part's own frame and the unit in brackets; to place one, negate y for a bottom-side part, rotate by r counter-clockwise, add the part's x,y. Pads: shape width x height; smd on the part's side, far side on the other; paste and mask are expansions set on the pad)
"4PQFN NON-IPC SITIME" [mm] "FP-SiT1602-2-MFG"
  rect 1.2x1.4 smd paste+0 mask+0: 1(-0.95,1.1) 2(-0.95,-1.1) 3(0.95,-1.1) 4(0.95,1.1)
  silkscreen extent -2.22,-2.34 1.28,2.32, body extent -1.65,-1.9 1.65,1.9, height 0.25
"8-TSOP 0.65MM PITCH 3MM WIDTH IPC MID DENSITY" [mm] "TSOP65P490X110-8N"
  oval 1.35x0.5 smd mask-0.02: 1(-2.225,1.025) 2(-2.225,0.345) 3(-2.225,-0.345) 4(-2.225,-1.025) 5(2.225,-1.025) 6(2.225,-0.345) 7(2.225,0.345) 8(2.225,1.025)
  silkscreen extent -3.15,-1.8 3.15,1.8, body extent -2.45,-1.55 2.45,1.55, height 1.1
"8-TSSOP 0.65MM PITCH 4.4MM WIDTH IPC MID DENSITY" [mm] "FP-PW0008A-IPC_B, Texas Instruments branding"
  rect 1.655x0.381 smd paste+0 mask+0: 1(-2.825,0.975)
  rrect100% 1.655x0.381 smd paste+0 mask+0: 2(-2.825,0.325) 3(-2.825,-0.325) 4(-2.825,-0.975) 5(2.825,-0.975) 6(2.825,-0.325) 7(2.825,0.325) 8(2.825,0.975)
  silkscreen extent -4.42,-1.5 1.5,1.5, body extent -3.2,-1.5 3.2,1.5, height 1.2
"10-SOP 0.5MM PITCH 3MM WIDTH IPC HIGH DENSITY" [mm] "SOP, 10-Leads, Body 3x3mm, Pitch 0.50mm, IPC High Density"
  oval 1.35x0.25 smd: 1(-2.1,1) 2(-2.1,0.5) 3(-2.1,0) 4(-2.1,-0.5) 5(-2.1,-1) 6(2.1,-1) 7(2.1,-0.5) 8(2.1,0) 9(2.1,0.5) 10(2.1,1)
  silkscreen extent -2.23,1.45 -2.08,1.6, body extent -2.45,-1.5 2.45,1.5, height 1.1
"12-TSOP 0.65MM PITCH 3MM WIDTH EP IPC MID DENSITY" [mm] "TSOP65P490X110_HS-13N"
  oval 1.35x0.5 smd mask-0.03: 1(-2.225,1.625) 2(-2.225,0.975) 3(-2.225,0.325) 4(-2.225,-0.325) 5(-2.225,-0.975) 6(-2.225,-1.625) 7(2.225,-1.625) 8(2.225,-0.975) 9(2.225,-0.325) 10(2.225,0.325) 11(2.225,0.975) 12(2.225,1.625)
  round 0.8 hole 0.5 mask-0.03: 13(0,-1) 13(0,0) 13(0,1)
  rect 1.76x2.95 smd: 13(0,0)
  silkscreen extent -3.15,-2.34 3.15,2.95, body extent -2.45,-2.05 2.45,2.05, height 1.1
"12DFN 3x3MM EP IPC MID DENSITY" [mm] "Exposed pad, Analog Devices logo"
  rect 0.831x0.222 smd paste+0 mask+0: 1(-1.441,1.125)
  rrect100% 0.831x0.222 smd paste+0 mask+0: 2(-1.441,0.675) 3(-1.441,0.225) 4(-1.441,-0.225) 5(-1.441,-0.675) 6(-1.441,-1.125) 7(1.441,-1.125) 8(1.441,-0.675) 9(1.441,-0.225) 10(1.441,0.225) 11(1.441,0.675) 12(1.441,1.125)
  rect 1.75x2.48 smd paste-1000 mask-0.05: 13(0,0)
  silkscreen extent -2.53,1 -2.28,1.25, body extent -1.5,-1.5 1.5,1.5, height 0.8
"14-SOIC 4MM WIDE LOW DENSITY" [mm]
  rrect15% 1.65x0.65 smd: 1(-2.825,3.81) 2(-2.825,2.54) 3(-2.825,1.27) 4(-2.825,0) 5(-2.825,-1.27) 6(-2.825,-2.54) 7(-2.825,-3.81) 8(2.825,-3.81) 9(2.825,-2.54) 10(2.825,-1.27) 11(2.825,0) 12(2.825,1.27) 13(2.825,2.54) 14(2.825,3.81)
  silkscreen extent -1.69,4.75 -1.44,5, body extent -3.02,-4.32 3.02,4.32, height 1.59
"16-SSOP 0.635MM PITCH 5.4MM WIDTH NON-IPC TI" [mm]
  rect 1.6x0.41 smd mask+0: 1(-2.7,2.222) 2(-2.7,1.587) 3(-2.7,0.952) 4(-2.7,0.317) 5(-2.7,-0.318) 6(-2.7,-0.953) 7(-2.7,-1.588) 8(-2.7,-2.223) 9(2.7,-2.222) 10(2.7,-1.587) 11(2.7,-0.952) 12(2.7,-0.317) 13(2.7,0.318) 14(2.7,0.953) 15(2.7,1.588) 16(2.7,2.223)
  silkscreen extent -3.75,-2.93 3.75,2.93, body extent -3,-2.48 2.99,2.42, height 1.75
"24-SOIC 7.6MM WIDE LOW DENSITY" [mm] "SOIC, 24-Leads, Body 15.6x7.6mm, Pitch 1.27mm, IPC Low Density"
  rrect15% 2.1x0.65 smd: 1(-4.85,6.985) 2(-4.85,5.715) 3(-4.85,4.445) 4(-4.85,3.175) 5(-4.85,1.905) 6(-4.85,0.635) 7(-4.85,-0.635) 8(-4.85,-1.905) 9(-4.85,-3.175) 10(-4.85,-4.445) 11(-4.85,-5.715) 12(-4.85,-6.985) 13(4.85,-6.985) 14(4.85,-5.715) 15(4.85,-4.445) 16(4.85,-3.175) 17(4.85,-1.905) 18(4.85,-0.635) 19(4.85,0.635) 20(4.85,1.905) 21(4.85,3.175) 22(4.85,4.445) 23(4.85,5.715) 24(4.85,6.985)
  silkscreen extent -3.4,-7.8 3.4,7.8, body extent -5.32,-7.8 5.33,7.8, height 2.71
"32TQFP 7X7MM IPC LOW DENSITY" [mm] "TSQFP50P700X700X120-32M"
  oval 1.6x0.3 smd mask-0.035: 1(-3.1,1.75) 2(-3.1,1.25) 3(-3.1,0.75) 4(-3.1,0.25) 5(-3.1,-0.25) 6(-3.1,-0.75) 7(-3.1,-1.25) 8(-3.1,-1.75) 17(3.1,-1.75) 18(3.1,-1.25) 19(3.1,-0.75) 20(3.1,-0.25) 21(3.1,0.25) 22(3.1,0.75) 23(3.1,1.25) 24(3.1,1.75)
  oval 0.3x1.6 smd mask-0.035: 9(-1.75,-3.1) 10(-1.25,-3.1) 11(-0.75,-3.1) 12(-0.25,-3.1) 13(0.25,-3.1) 14(0.75,-3.1) 15(1.25,-3.1) 16(1.75,-3.1) 25(1.75,3.1) 26(1.25,3.1) 27(0.75,3.1) 28(0.25,3.1) 29(-0.25,3.1) 30(-0.75,3.1) 31(-1.25,3.1) 32(-1.75,3.1)
  silkscreen extent -3.22,0.8 -0.8,2.57, body extent -3.5,-3.5 3.5,3.5, height 1.2
"CAP 0603 IPC MID DENSITY" [mm]
  rrect25% 1.1x1 smd: 1(-0.85,0) 2(0.85,0)
  silkscreen extent -0.15,-0.7 0.15,0.7, body extent -0.8,-0.4 0.8,0.4, height 0.3
"CAP 0603 NON-IPC KEMET X7R" [mm]
  rect 0.75x0.9 smd paste+0 mask+0: 1(-0.6,0) 2(0.6,0)
  body extent -1.2,-0.6 1.2,0.6, height 0.25
"CAP 0805 IPC MID DENSITY" [mm]
  rect 1.15x1.45 smd paste+0 mask+0: 1(-0.9,0) 2(0.9,0)
  silkscreen extent -1.48,-0.97 1.48,0.97, body extent -1,-0.7 1,0.7, height 1.22
"CAP 0805 NON-IPC KEMET X5R" [mm]
  rect 0.95x1.35 smd paste+0 mask+0: 1(-0.75,0) 2(0.75,0)
  silkscreen extent -1.1,-1.05 1.1,1.05, body extent -1,-0.63 1,0.63, height 1.4
"CAP 1206 IPC LOW DENSITY" [mm]
  rrect25% 1.1x1.6 smd: 1(-1.55,0) 2(1.55,0)
  silkscreen extent -2.67,-1.2 2.67,1.17, body extent -1.7,-0.9 1.7,0.9, height 1.8
"CAP 1206 NON-IPC KEMET NP0" [mm]
  rect 0.95x1.7 smd paste+0 mask+0: 1(-1.4,0) 2(1.4,0)
  body extent -2,-1 2,1, height 0.25
"CAP 1206 UNKNOWN" [mm] "Ceramic Capacitors, body 3.2x1.6mm, WCAP-CSGP_1206_L3.2W1.6H0.8"
  rect 0.9x1.6 smd: 1(-1.55,0) 2(1.55,0)
  body extent -1.6,-0.8 1.6,0.8, height 0.8
"DO-214AC SMA VISHAY" [mm]
  rect 1.88x1.52 smd mask+0: 1(-1.93,0) 2(1.93,0)
  silkscreen extent -2.82,-1.55 2.1,1.62, body extent -2.55,-1.33 2.55,1.33, height 2.29
"IND VLS3012CX-1 NONSTANDARD TDK" [mm]
  rect 1.2x3 smd mask+0: 1(-1.1,0) 2(1.1,0)
  silkscreen extent -0.25,-1.75 0.25,1.75, body extent -1.5,-1.51 1.5,1.51, height 1.19
"LED 0603 MID DENSITY" [mm]
  rrect25% 1x1 smd: 1(0.8,0) 2(-0.8,0)
  silkscreen extent 1.46,-0.76 1.56,-0.66, body extent -0.8,-0.4 0.8,0.4, height 0.7
MS511-20 [mm]
  round 1.5 hole 0.8 slot 1.8 at 90 deg: 1(0,0) 1(50.799,0)
  Top Layer lines w0.2: -0.127,5.334 0,5.207
  Top Layer lines w1.5: 2.85,18.998 ccw(c2.85,16.148) 0,16.2 0,0 0,-16.2 ccw(c2.85,-16.148) 2.85,-18.998 47.95,-18.998 ccw(c47.95,-16.148) 50.799,-16.2 50.799,0 50.799,16.2 ccw(c47.95,16.148) 47.95,18.998 2.85,18.998
  body extent -0.13,-19.33 50.97,19.07, height 6.51
"POLYFUSE 1812 NON-IPC BELFUSE" [mm]
  rect 1.78x3.5 smd mask+0: 1(-2.615,0) 2(2.615,0)
  silkscreen extent -1.35,-1.75 1.35,1.75, body extent -2.27,-1.62 2.27,1.62, height 0.7
RELAY_3-1462037-1 [mm]
  rect 2x0.7 smd paste+0 mask+0.102: 1(-3,3.8) 2(-3,0.6) 3(-3,-1.6) 4(-3,-3.8) 5(3,-3.8) 6(3,-1.6) 7(3,0.6) 8(3,3.8)
  silkscreen extent -4.6,-5 3,5, body extent -3.85,-4.97 3.93,5.03, height 5.66
"RES 0402 IPC LOW DENSITY" [mm]
  rect 0.7x0.65 smd: 1(-0.475,0) 2(0.475,0)
  body extent -0.53,-0.27 0.53,0.28, height 0.4
"RES 0402 IPC LOW DENSITY YAGEO" [mm]
  rect 0.715x0.672 smd paste+0 mask+0: 1(-0.479,0) 2(0.479,0)
  silkscreen extent -0.84,-0.74 0.84,0.74, body extent -0.5,-0.25 0.5,0.25, height 0.4
"RES 0402 IPC MID DENSITY" [mm] "Chip Resistor, 2-Leads, Body 1.00x0.50mm, IPC Medium Density"
  rect 0.6x0.55 smd: 1(-0.425,0) 2(0.425,0)
  body extent -0.53,-0.27 0.53,0.28, height 0.4
"RES 0402 NON-IPC SEI" [mm]
  rect 0.5x0.6 smd paste+0 mask+0: 1(-0.5,0) 2(0.5,0)
  body extent -0.85,-0.4 0.85,0.4, height 0.25
"RES 0402 NON-IPC YAGEO" [mm]
  rect 0.5x0.6 smd paste+0 mask+0: 1(-0.5,0) 2(0.5,0)
  body extent -0.85,-0.4 0.85,0.4, height 0.25
"RES 0603 IPC MID DENSITY" [mm]
  rrect25% 1.1x1 smd: 1(-0.85,0) 2(0.85,0)
  silkscreen extent -0.15,-0.7 0.15,0.7, body extent -0.77,-0.43 0.78,0.43, height 0.44
"RES 0805 IPC HIGH DENSITY" [mm] "Chip Resistor, 2-Leads, Body 2.00x1.25mm, IPC High Density"
  rect 1x1.35 smd: 1(-0.75,0) 2(0.75,0)
  body extent -1.1,-0.72 1.1,0.72, height 0.6
"RES 1206 IPC MID DENSITY" [mm] "Chip Resistor, 2-Leads, Body 3.13x1.55mm, IPC Medium Density"
  rect 1.2x1.65 smd: 1(-1.4,0) 2(1.4,0)
  body extent -1.6,-0.8 1.6,0.8, height 0.6
"RES 1206 NON-IPC VISHAY" [mm]
  rect 1.15x1.75 smd paste+0 mask+0: 1(-1.325,0) 2(1.325,0)
  silkscreen extent -0.38,-0.87 0.38,0.87, body extent -1.6,-0.8 1.6,0.8, height 0.65
SAMTEC_FTSH-110-01-X-DV-K-TR [mil]
  rect 29x110 smd paste+0 mask+4.02: 01(-225,-80) 02(-225,80) 03(-175,-80) 04(-175,80) 05(-125,-80) 06(-125,80) 07(-75,-80) 08(-75,80) 09(-25,-80) 10(-25,80) 11(25,-80) 12(25,80) 13(75,-80) 14(75,80) 15(125,-80) 16(125,80) 17(175,-80) 18(175,80) 19(225,-80) 20(225,80)
  silkscreen extent -253,-178 253,68, body extent -250,-115 250,115, height 242
"SOD-123 ONSEMI SMALL PADS" [mm]
  rect 0.9x0.95 smd paste+0 mask+0: 1(-1.68,0)
  rrect100% 0.9x0.95 smd paste+0 mask+0: 2(1.68,0)
  silkscreen extent -2.28,-0.8 1.35,1.14, body extent -1.84,-0.8 1.84,0.8, height 1.35
"SOT23-5 HIGH DENSITY AD" [mm] "FP-UJ-5-IPC_C"
  rect 1.254x0.532 smd paste+0 mask+0: 1(-1.05,0.95)
  rrect100% 1.254x0.532 smd paste+0 mask+0: 2(-1.05,0) 3(-1.05,-0.95) 4(1.05,-0.95) 5(1.05,0.95)
  silkscreen extent -1.4,-1.7 1.4,1.75, body extent -1.4,-1.45 1.4,1.45, height 1
"SOT23-5 MID DENSITY" [mm] "SOT23, 5-Leads, Body 3.05x1.75mm, Pitch 0.95mm, IPC Medium Density"
  rrect17% 1x0.6 smd: 1(-1.375,0.95) 2(-1.375,0) 3(-1.375,-0.95) 4(1.375,-0.95) 5(1.375,0.95)
  silkscreen extent -1.5,-1.55 0.5,1.92, body extent -1.42,-1.46 1.42,1.46, height 1.08
"SOT23-6 NON-IPC DIODES" [mm]
  rect 1x0.55 smd mask+0: 1(-1.4,0.95)
  rrect50% 1x0.55 smd mask+0: 2(-1.4,0) 3(-1.4,-0.95) 4(1.4,-0.95) 5(1.4,0) 6(1.4,0.95)
  silkscreen extent -1.53,-1.55 0.5,1.93, body extent -1.49,-1.54 1.51,1.56, height 1.4
SOT95P245X110-3N [mm] "SOT23, 3-Leads, Body 2.90x2.45mm, Pitch 0.95mm, IPC Medium Density"
  rect 1x0.6 smd: 1(-1.2,0.95) 2(-1.2,-0.95) 3(1.2,0)
  silkscreen extent -1.32,-1.5 0.7,1.92, body extent -0.7,-1.5 0.7,1.5, height 1.1
SOT95P280X145-5N [mm]
  rrect25% 1.21x0.59 smd: 1(-1.255,0.95) 2(-1.255,0) 3(-1.255,-0.95) 4(1.255,-0.95) 5(1.255,0.95)
  silkscreen extent -2.85,-1.45 0.8,1.45, body extent -1.4,-1.45 1.4,1.45, height 1.45
"SOT363-6 MID DENSITY" [mm] "Technically non-IPC, adapted from TI datasheet for SOTx311 chips"
  rect 0.9x0.4 smd paste+0 mask+0: 1(-1.1,0.65)
  rrect25% 0.9x0.4 smd paste+0 mask+0: 2(-1.1,0) 3(-1.1,-0.65) 4(1.1,-0.65) 5(1.1,0) 6(1.1,0.65)
  silkscreen extent -1.17,-1.22 0.7,1.32, body extent -1.05,-1 1.05,1, height 1
SOT563 [mm]
  rect 0.6x0.35 smd: 1(-0.925,0.5) 2(-0.925,0) 3(-0.925,-0.5) 4(0.925,-0.5) 5(0.925,0) 6(0.925,0.5)
  silkscreen extent -1.05,-0.85 0.25,1.35, body extent -0.95,-0.85 0.95,0.85, height 0.6
"TESTPOINT THT" [mm]
  round 1 hole 0.5: 1(0,0)
USB_MINIB_RIGHTANGLE [mm]
  round 1.2 hole 0.75: 1(-1.6,5.05) 2(-0.8,3.85) 3(0,5.05) 4(0.8,3.85) 5(1.6,5.05)
  oval 1.258x2.516 hole 0.75 slot 1.95 at 90 deg: 6(-3.65,0) 6(3.65,0)
  silkscreen extent -3.85,-2.1 3.85,6.35, body extent -3.97,-3.75 3.93,5.65, height 3.91